# Altium PCB Power_driver_PCB.PcbDoc
Units mm, origin at the board's own origin, x right, y up, seen from the top; angles counter-clockwise.
Board outline 60 x 73.62 mm, 4 copper layers (Top Layer, GND layer, Power Layer, Bottom Layer), stack 1.572 mm thick; 105 components, 72 nets, 373 pads, 286 vias.
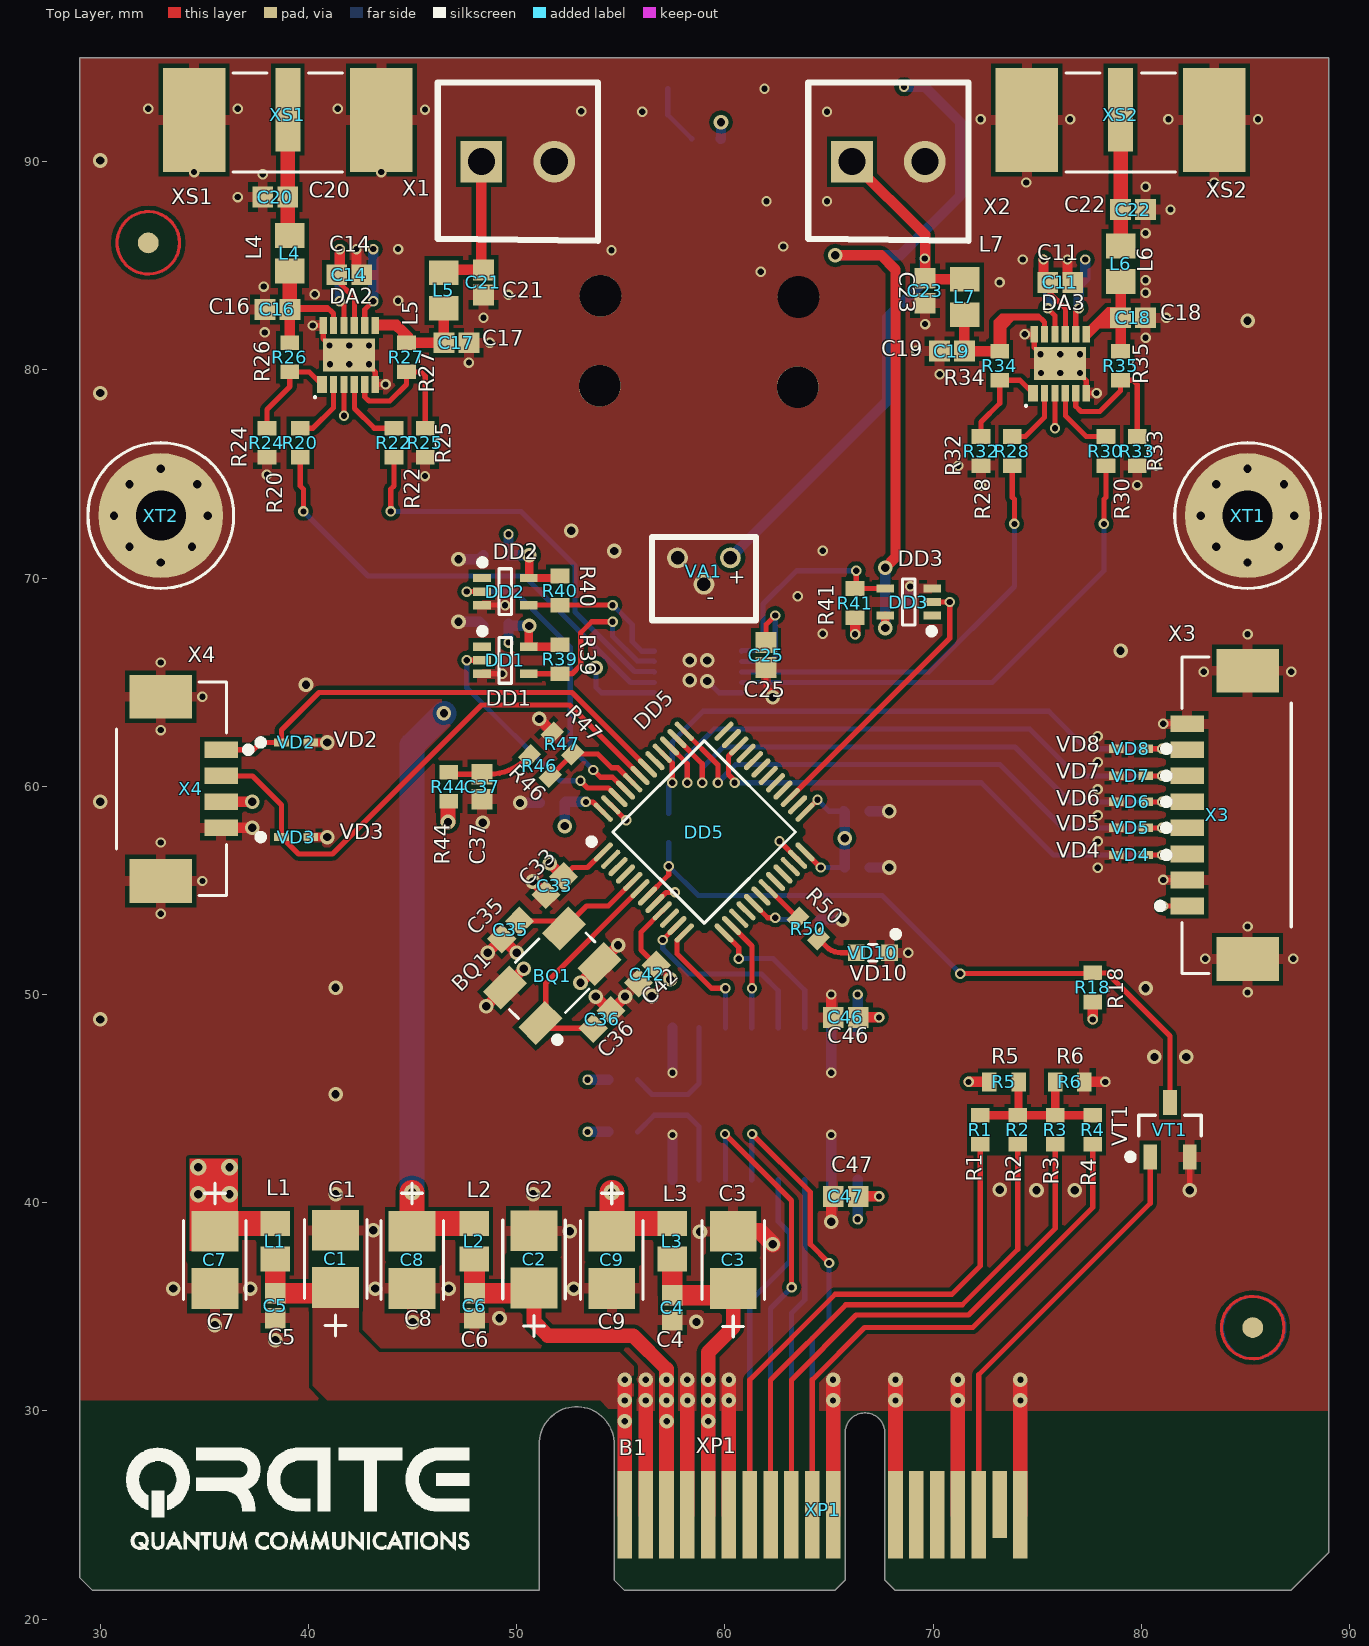
[diagram p0: Top Layer view]
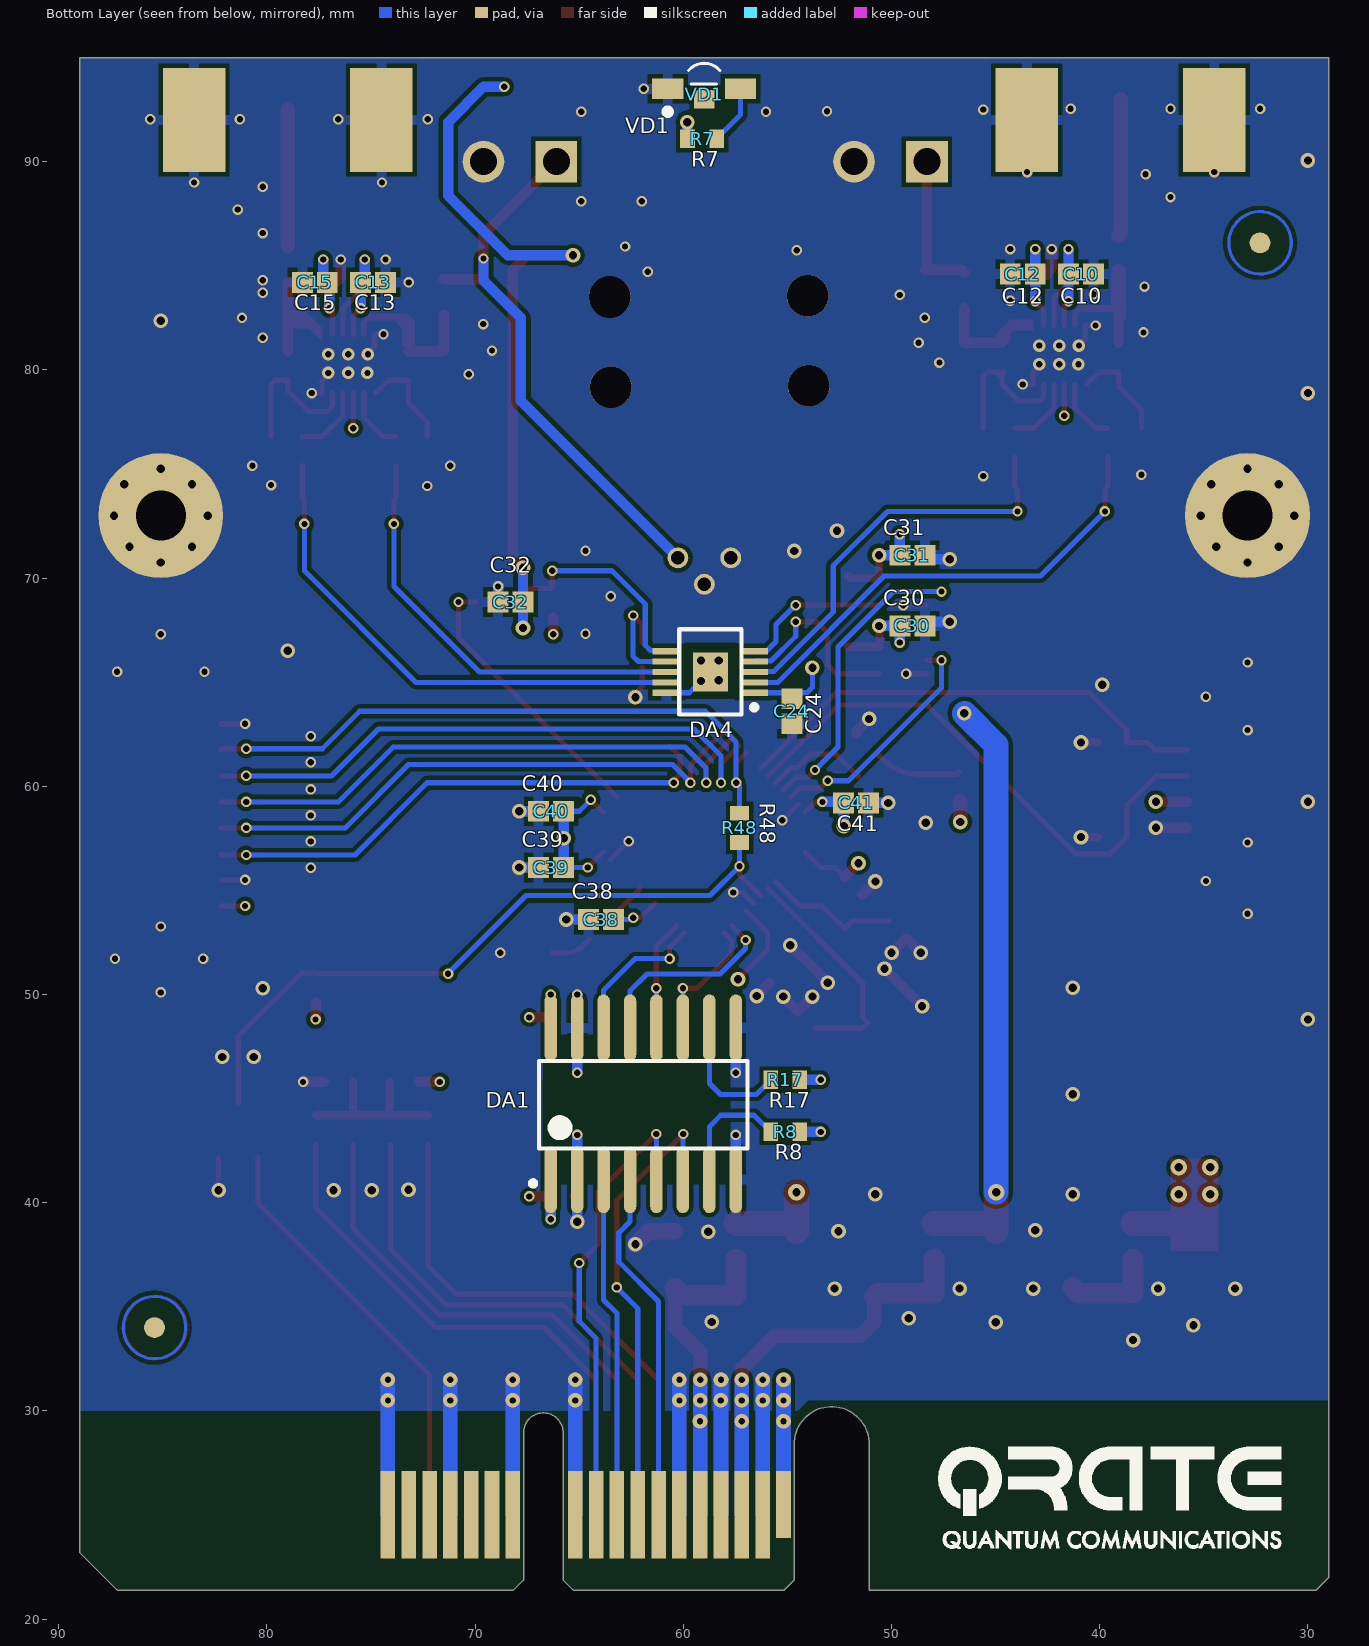
[diagram p1: Bottom Layer view, seen from below]
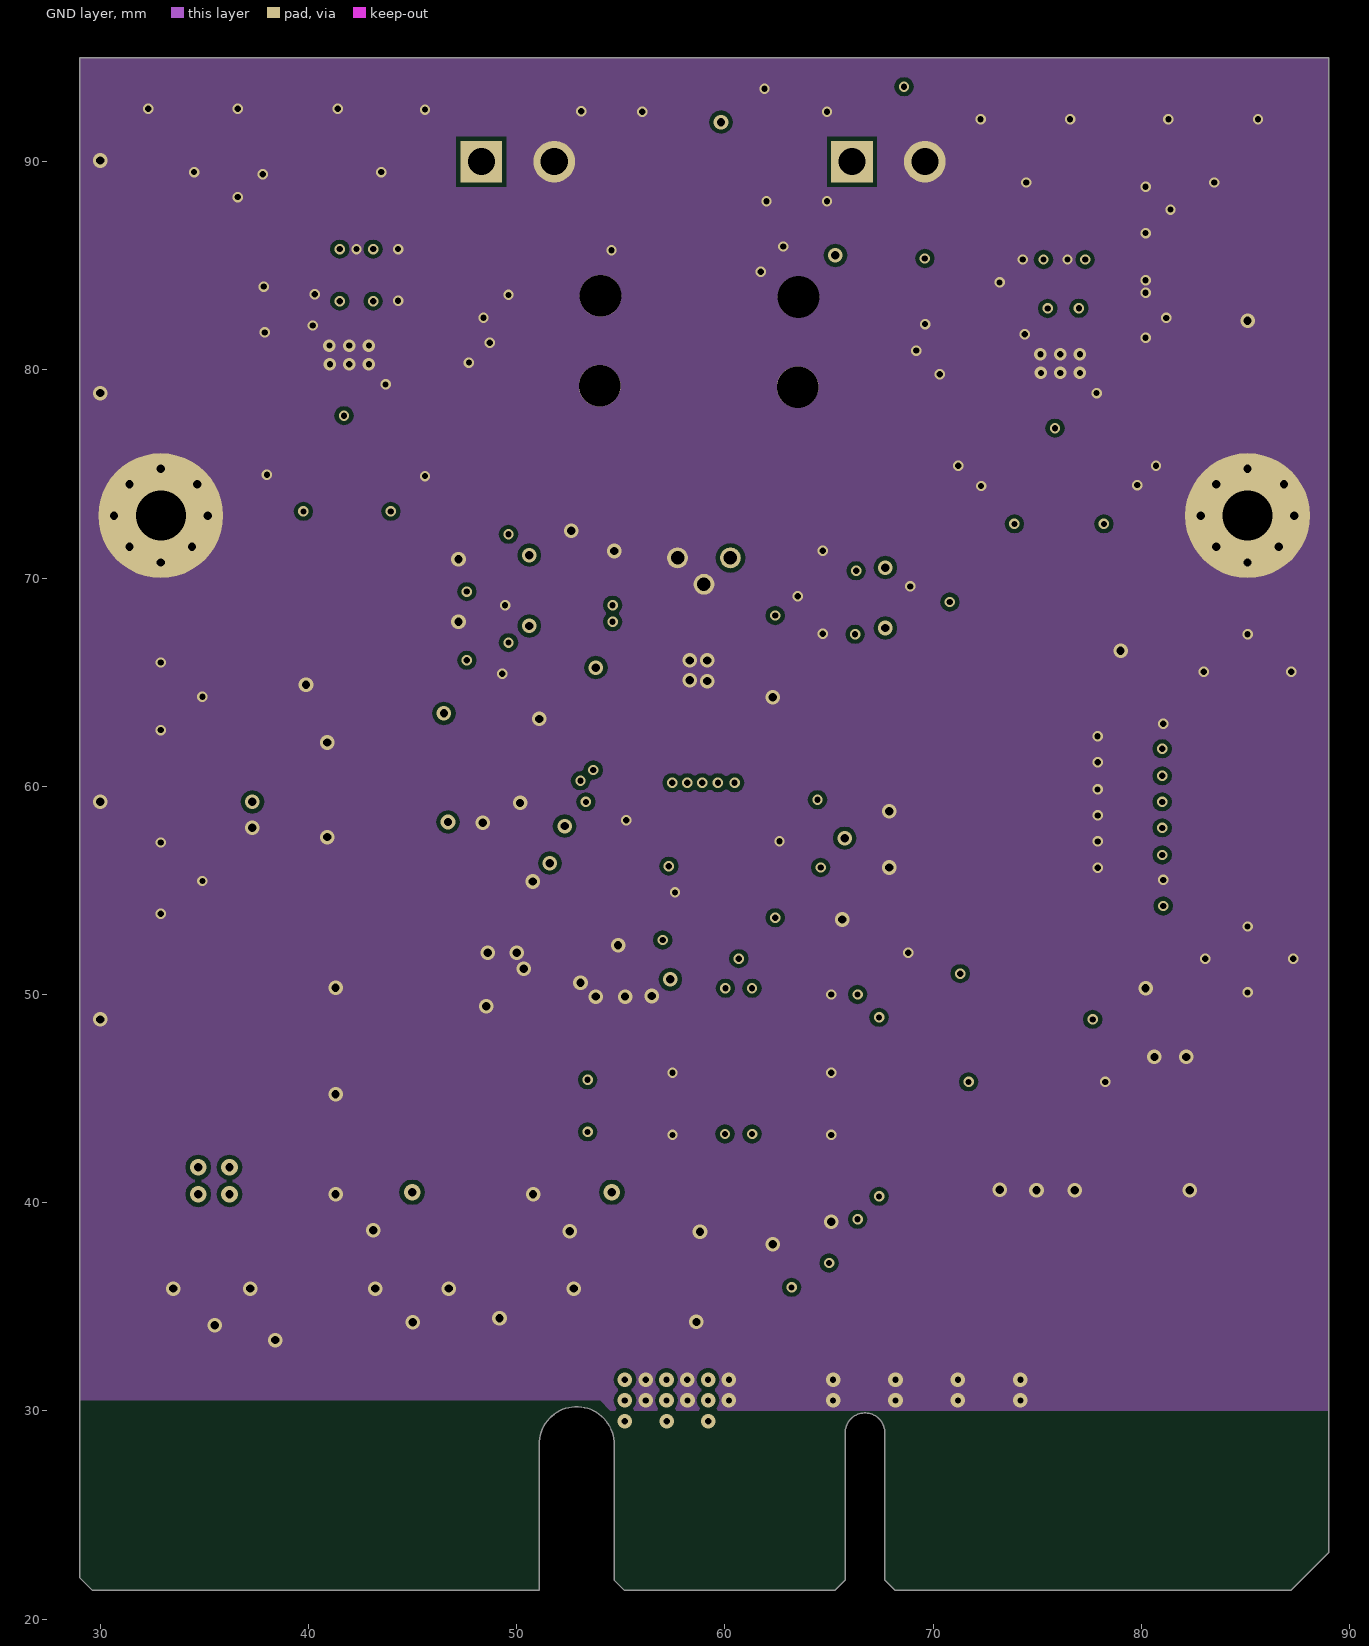
[diagram p2: GND layer]
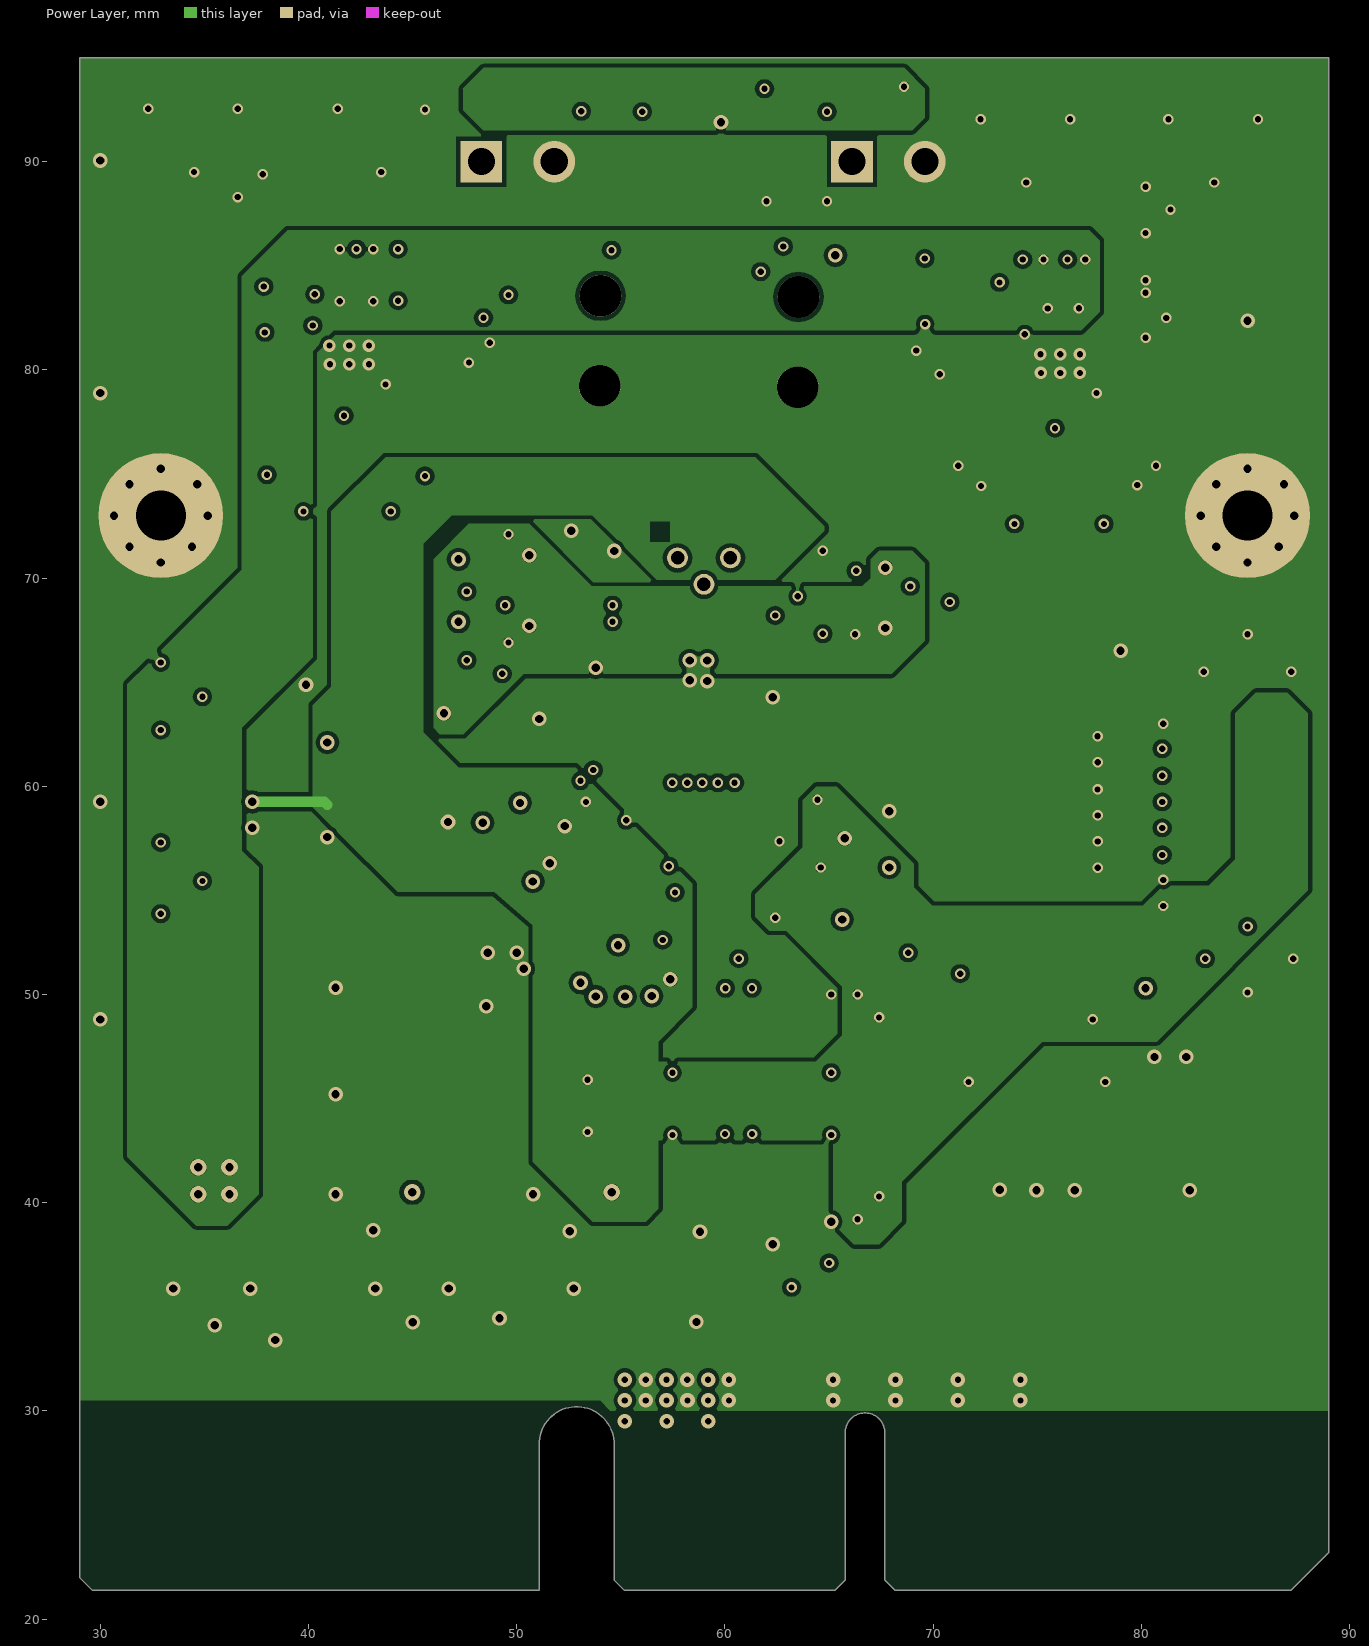
[diagram p3: Power Layer]
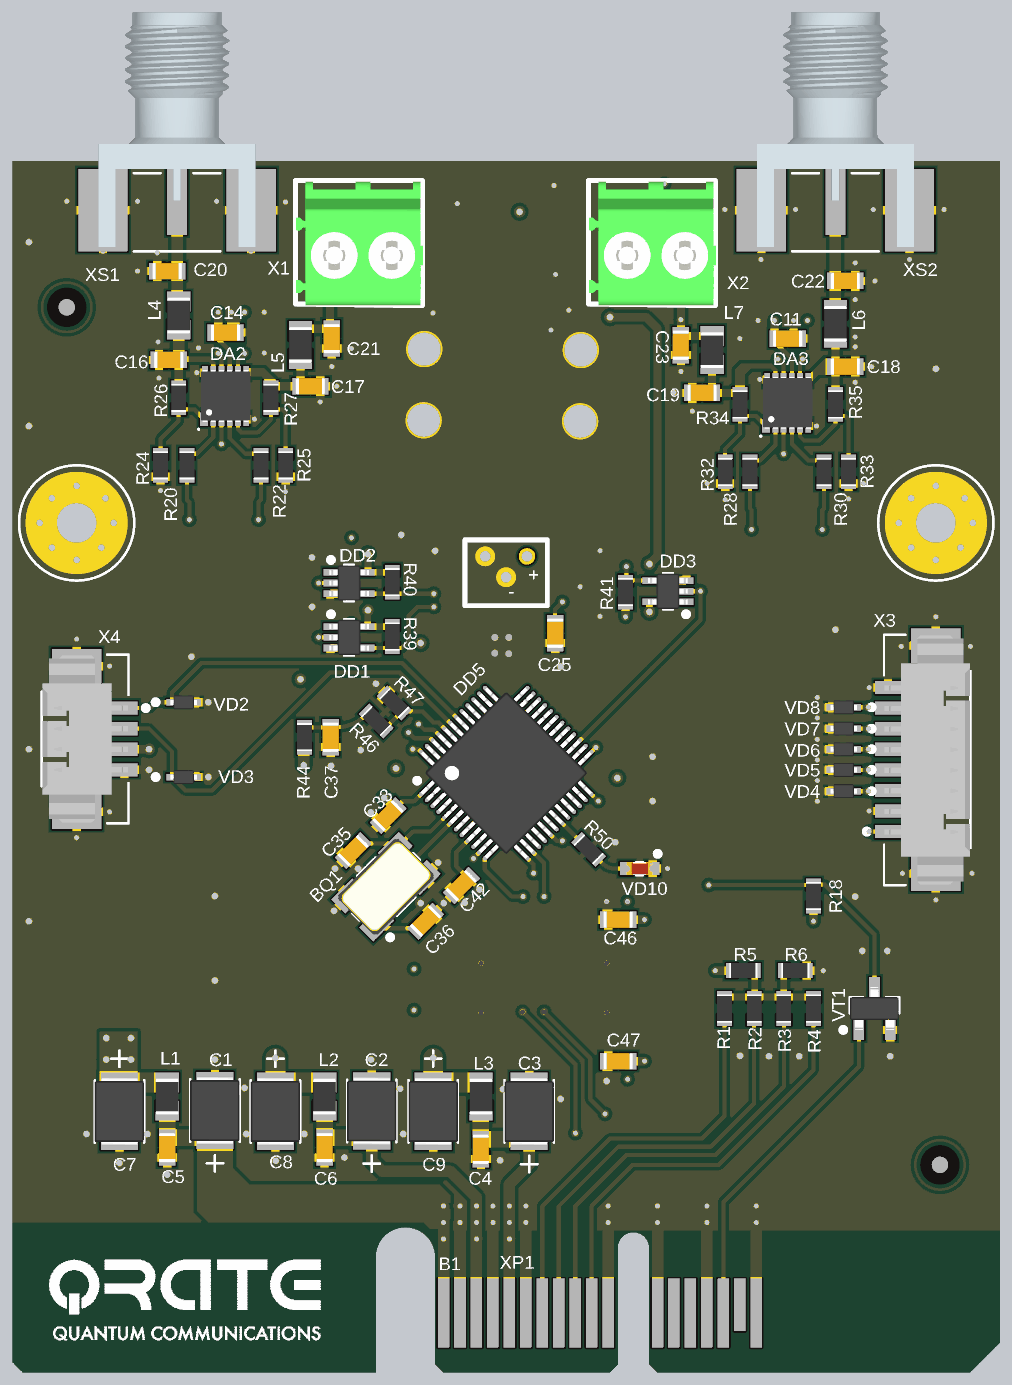
[diagram p4: 3D render of the assembled board from above, using the file's embedded part models]
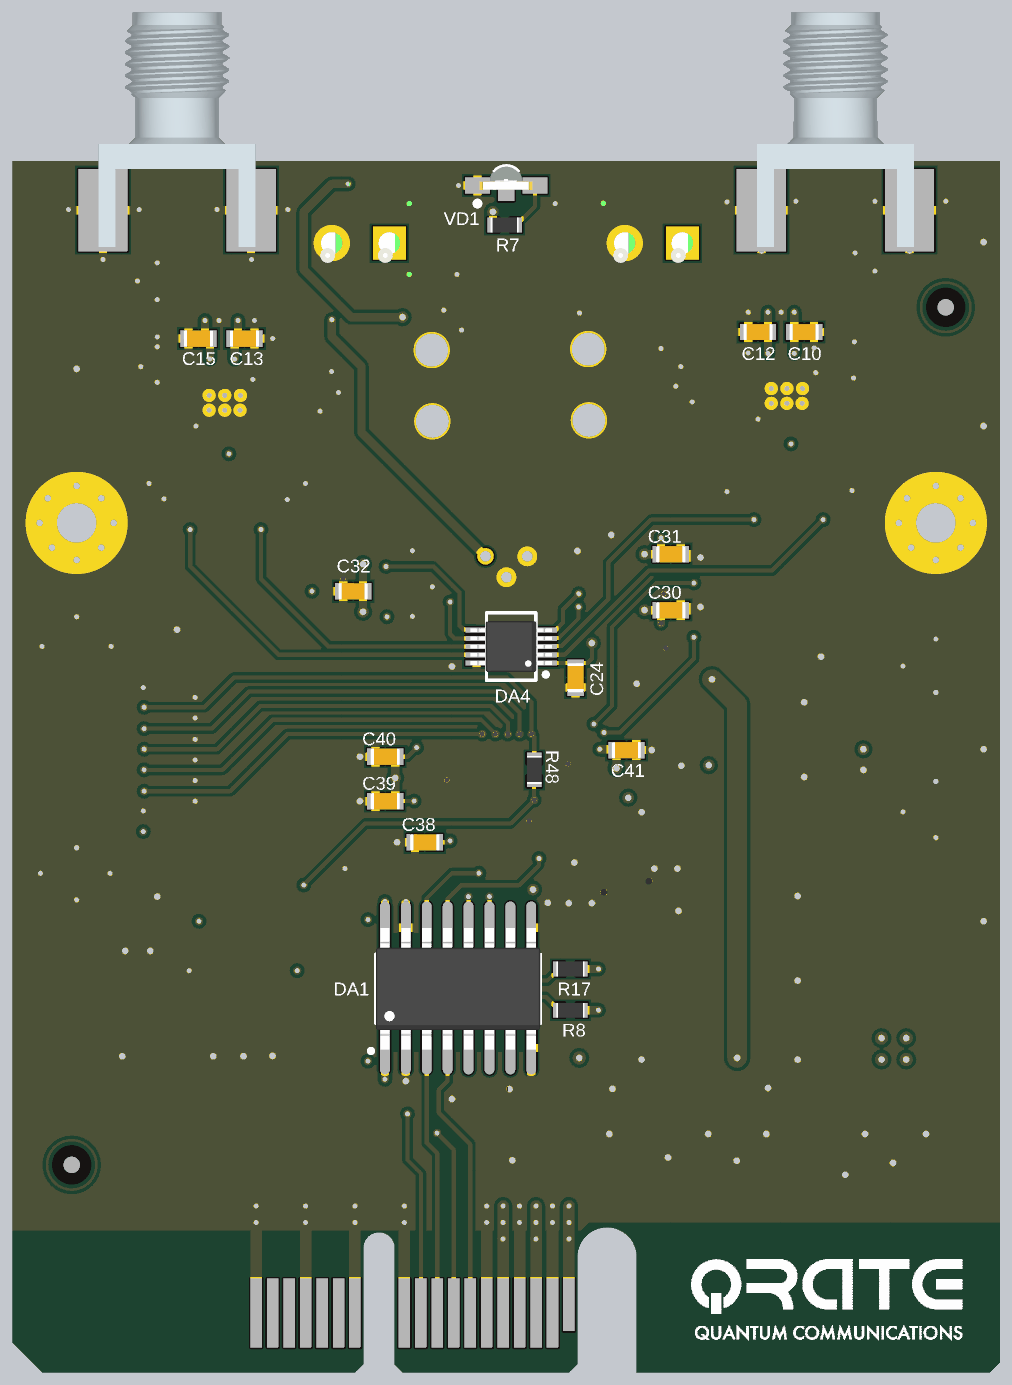
[diagram p5: 3D render of the assembled board from below, using the file's embedded part models]

## Layer stack, top to bottom
Top Solder: solder mask 0.02, Solder Resist, Dk 3.5
Top Layer: signal copper 0.018
Dielectric 1: prepreg 0.15, Dk 4.2
GND layer: signal copper 0.018
Dielectric 4: core 1.2, FR-4, Dk 4.2
Power Layer: signal copper 0.018
Dielectric 5: prepreg 0.15, Dk 4.2
Bottom Layer: signal copper 0.018
Bottom Solder: solder mask 0.02, Solder Resist, Dk 3.5

## Board outline
29,22 29.625,21.375 51.075,21.375 51.075,28.375 cw(c52.875,28.4) 54.675,28.375 54.675,21.875 55.175,21.375 65.275,21.375 65.775,21.875 65.775,28.925 cw(c66.725,28.953) 67.675,28.925 67.675,21.875 68.175,21.375 87.175,21.375 89,23.2 89,95 29,95

## Design rules (kind name [scope] priority, off if disabled: settings)
Clearance [All] p1: gap=0.2 ignorepadtopadclearanceinfootprint=FALSE except(0: Arc-Hole Track-Hole SMDPad-Hole THPad-Hole Via-Hole Fill-Hole Poly-Hole Region-Hole Text-Hole; 0.1: SMDPad-SMDPad Via-Via)
PlaneClearance [All] p1: clearance=0.2
PlaneConnect [All] p1: planeconnectstyle=Direct reliefexpansion=0.508 reliefentries=4 reliefconductorwidth=0.254 reliefairgap=0.254
PolygonConnect PolygonConnect_1 [InNet('GND')] p1: thpad.connectstyle=Direct thpad.reliefconductorwidth=0.254 thpad.reliefentries=4 thpad.polygonreliefangle="90 Angle" thpad.airgapwidth=0.254 smdpad.connectstyle=Relief smdpad.reliefconductorwidth=0.5 smdpad.reliefentries=4 smdpad.polygonreliefangle="90 Angle" smdpad.airgapwidth=0.2 via.connectstyle=Direct via.reliefconductorwidth=0.254 via.reliefentries=4 via.polygonreliefangle="90 Angle" via.airgapwidth=0.2
PolygonConnect [(InNet('+3,3V') AND InNet('+3,3V_IN') AND InNet('+12V_IN') AND InNet('+12V')AND InNet('+5V_IN') AND InNet('+5V'))] p2: connectstyle=Direct reliefconductorwidth=0.254 reliefentries=4 polygonreliefangle="90 Angle" airgapwidth=0.254
RoutingVias [All] p1: holewidth=0.4 width=0.7 viastyle="Through Hole" minholewidth=0.3 minwidth=0.5 maxholewidth=5 maxwidth=10
SolderMaskExpansion [All] p1: expansion=0.102
Width [All] p1: maxlimit=2 minlimit=0.1 preferedwidth=0.25
28 further rules are at their usual default settings.

## Classes and differential pairs
component class Power_driver_MCU: BQ1 C33 C35 C36 C37 C38 C39 C40 C41 C42 DD5 R44 R46 R47 R48 R50 VD10 VT1
component class Power_driver_power: C1 C2 C3 C4 C5 C6 C7 C8 C9 C46 C47 DA1 L1 L2 L3 R1 R2 R3 R4 R5 R6 R7 R8 R17 R18 VD1 VD2 VD3 VD4 VD5 VD6 VD7 VD8 XP1 XT1 XT2
component class Power_driver_DAC_Connectors: C24 C25 C30 C31 C32 DA4 DD1 DD2 DD3 R39 R40 R41 VA1 X1 X2 X3 X4 XS1 XS2
component class Power_driver_AMP: C10 C11 C12 C13 C14 C15 C16 C17 C18 C19 C20 C21 C22 C23 DA2 DA3 L4 L5 L6 L7 R20 R22 R24 R25 R26 R27 R28 R30 R32 R33 R34 R35

## Components (designator, comment, footprint, x,y, rotation, side; value= is the part's Value field where it differs from the comment)
BQ1 "8MHz 16pF" Crystal_50x32x110 51.7,50.9 r45 top
C1 "22u 20V" B_CAPMP3528X21N 41.3,37.3 r90 top
C2 "22u 20V" B_CAPMP3528X21N 50.828,37.275 r90 top
C3 "22u 20V" B_CAPMP3528X21N 60.394,37.25 r90 top
C4 "1u 50V" C0603_CAPC1608X09N 57.464,34.95 r90 top
C5 "1u 50V" C0603_CAPC1608X09N 38.4,35.05 r90 top
C6 "1u 50V" C0603_CAPC1608X09N 47.964,35.05 r90 top
C7 "22u 20V" B_CAPMP3528X21N 35.5,37.25 r270 top
C8 "22u 20V" B_CAPMP3528X21N 44.974,37.25 r270 top
C9 "22u 20V" B_CAPMP3528X21N 54.564,37.25 r270 top
C10 "0,1u 50V" C0603_CAPC1608X09N 40.9,84.6 r180 bottom
C11 "0,1u 50V" C0603_CAPC1608X09N 76.1,84.2 r0 top
C12 "0,1u 50V" C0603_CAPC1608X09N 43.7,84.6 r0 bottom
C13 "0,1u 50V" C0603_CAPC1608X09N 74.9,84.2 r180 bottom
C14 "0,1u 50V" C0603_CAPC1608X09N 41.95,84.565 r0 top
C15 "0,1u 50V" C0603_CAPC1608X09N 77.7,84.2 r0 bottom
C16 "1u 50V" C0603_CAPC1608X09N 38.5,82.9 r0 top
C17 "1u 50V" C0603_CAPC1608X09N 47.1,81.3 r180 top
C18 "1u 50V" C0603_CAPC1608X09N 79.6,82.5 r180 top
C19 "1u 50V" C0603_CAPC1608X09N 70.9,80.9 r0 top
C20 "0,1u 50V" C0603_CAPC1608X09N 38.4,88.3 r180 top
C21 "0,1u 50V" C0603_CAPC1608X09N 48.4,84.2 r270 top
C22 "0,1u 50V" C0603_CAPC1608X09N 79.6,87.7 r0 top
C23 "0,1u 50V" C0603_CAPC1608X09N 69.61,83.8 r270 top
C24 "0,1u 50V" C0603_CAPC1608X09N 54.786,63.6 r90 bottom
C25 "0,1u 50V" C0603_CAPC1608X09N 61.972,66.3 r90 top
C30 "0,1u 50V" C0603_CAPC1608X09N 49,67.7 r180 bottom
C31 "0,1u 50V" C0603_CAPC1608X09N 49,71.1 r180 bottom
C32 "0,1u 50V" C0603_CAPC1608X09N 68.3,68.85 r0 bottom
C33 "1u 50V" C0603_CAPC1608X09N 51.824,55.224 r45 top
C35 "5 50V" C0603_CAPC1608X09N 49.7,53.1 r45 top
C36 "5 50V" C0603_CAPC1608X09N 54.1,48.8 r225 top
C37 "0,1u 50V" C0603_CAPC1608X09N 48.334,59.98 r270 top
C38 "0,01u 50V" C0603_CAPC1608X09N 63.949,53.6 r180 bottom
C39 "0,01u 50V" C0603_CAPC1608X09N 66.35,56.097 r180 bottom
C40 "0,01u 50V" C0603_CAPC1608X09N 66.35,58.797 r180 bottom
C41 "0,1u 50V" C0603_CAPC1608X09N 51.7,59.2 r0 bottom
C42 "0,1u 50V" C0603_CAPC1608X09N 56.276,50.976 r45 top
C46 "0,01u 50V" C0603_CAPC1608X09N 65.8,48.899 r180 top
C47 "0,01u 50V" C0603_CAPC1608X09N 65.8,40.301 r180 top
DA1 "MAX14931DA" SOIC127P740X110-16N 61.925,44.7 r90 bottom
DA2 "NCS5652MUTWG" "UDFN12 3x3, 0.5P" 41.95,80.715 r90 top
DA3 "NCS5652MUTWG" "UDFN12 3x3, 0.5P" 76.1,80.3 r90 top
DA4 "LTC2634CMS-HZ8" MSOP50P500X110_HS-11N 58.7,65.489 r0 bottom
DD1 "SN74LVC1G07DCK" SC70_SOT65P210X110-5N 49.451,66.05 r0 top
DD2 "SN74LVC1G07DCK" SC70_SOT65P210X110-5N 49.451,69.35 r0 top
DD3 "SN74LVC1G07DCK" SC70_SOT65P210X110-5N 68.825,68.85 r180 top
DD5 "STM32F373CCT6" LQFP48_TSQFP50P900X900X160-48L 59,57.8 r45 top
L1 "220 2A" I0805_INDC2012X11N 38.4,38.15 r90 top
L2 "220 2A" I0805_INDC2012X11N 47.964,38.15 r90 top
L3 "220 2A" I0805_INDC2012X11N 57.464,38.15 r90 top
L4 "220 2A" I0805_INDC2012X11N 39.1,85.6 r90 top
L5 "220 2A" I0805_INDC2012X11N 46.5,83.815 r90 top
L6 "220 2A" I0805_INDC2012X11N 79,85.1 r90 top
L7 "220 2A" I0805_INDC2012X11N 71.51,83.5 r90 top
R1 "0 5%" R0603_RESC1608X06N 72.263,43.5 r90 top
R2 "0 5%" R0603_RESC1608X06N 74.063,43.5 r90 top
R3 "0 5%" R0603_RESC1608X06N 75.863,43.5 r90 top
R4 "0 5%" R0603_RESC1608X06N 77.663,43.5 r90 top
R5 "10k 5%" R0603_RESC1608X06N 73.4,45.8 r180 top
R6 "10k 5%" R0603_RESC1608X06N 76.563,45.8 r0 top
R7 "470 5%" R0603_RESC1608X06N 59.1,91.1 r180 bottom
R8 "3,32k 1%" R0603_RESC1608X06N 55.1,43.4 r0 bottom
R17 "3,32k 1%" R0603_RESC1608X06N 55.1,45.9 r0 bottom
R18 "3,32k 1%" R0603_RESC1608X06N 77.663,50.337 r90 top
R20 "0 5%" R0603_RESC1608X06N 39.6,76.5 r90 top
R22 "0 5%" R0603_RESC1608X06N 44.1,76.5 r90 top
R24 "10k 1%" R0603_RESC1608X06N 38,76.5 r90 top
R25 "10k 1%" R0603_RESC1608X06N 45.6,76.5 r90 top
R26 "30,1k 1%" R0603_RESC1608X06N 39.1,80.6 r90 top
R27 "30,1k 1%" R0603_RESC1608X06N 44.7,80.6 r90 top
R28 "49,9 1%" R0603_RESC1608X06N 73.8,76.1 r90 top
R30 "49,9 1%" R0603_RESC1608X06N 78.3,76.1 r90 top
R32 "10k 1%" R0603_RESC1608X06N 72.3,76.1 r90 top
R33 "10k 1%" R0603_RESC1608X06N 79.8,76.1 r90 top
R34 "10k 1%" R0603_RESC1608X06N 73.2,80.2 r90 top
R35 "10k 1%" R0603_RESC1608X06N 79,80.2 r90 top
R39 "10k 5%" R0603_RESC1608X06N 52.076,66.1 r270 top
R40 "10k 5%" R0603_RESC1608X06N 52.076,69.4 r270 top
R41 "10k 5%" R0603_RESC1608X06N 66.249,68.8 r90 top
R44 "100 5%" R0603_RESC1608X06N 46.734,59.98 r90 top
R46 "100 5%" R0603_RESC1608X06N 51.105,60.975 r315 top
R47 "10k 5%" R0603_RESC1608X06N 52.194,62.049 r315 top
R48 "100 5%" R0603_RESC1608X06N 57.3,58 r270 bottom
R50 "330 5%" R0603_RESC1608X06N 64,53.163 r315 top
VA1 "MEMS Attenuator" ATTENUATOR 58.991,70.97 r0 top
VD1 "Green" LED3010X012 60.75,93.5 r180 bottom locked
VD2 "PESD3V3S1UB,115" SOD523_SODFL160X65-2N 39.4,62.103 r0 top
VD3 "PESD3V3S1UB,115" SOD523_SODFL160X65-2N 39.4,57.561 r0 top
VD4 "PESD3V3S1UB,115" SOD523_SODFL160X65-2N 79.5,56.7 r180 top
VD5 "PESD3V3S1UB,115" SOD523_SODFL160X65-2N 79.5,58 r180 top
VD6 "PESD3V3S1UB,115" SOD523_SODFL160X65-2N 79.5,59.25 r180 top
VD7 "PESD3V3S1UB,115" SOD523_SODFL160X65-2N 79.5,60.5 r180 top
VD8 "PESD3V3S1UB,115" SOD523_SODFL160X65-2N 79.5,61.8 r180 top
VD10 "Red" LED_0603 67.9,52 r180 top
VT1 "BSS138" SOT23_SOT95P237X110-3M 81.374,43.5 r90 top
X1 "PT 1,5/ 2-3,5-H" "PT 1,5/ 2-3,5-H" 48.3,90 r0 top locked
X2 "PT 1,5/ 2-3,5-H" "PT 1,5/ 2-3,5-H" 66.1,90 r0 top locked
X3 "53261-0871" 53261-0871 82.2,54.25 r90 top
X4 "53261-0471" 53261-0471 35.8,61.75 r270 top
XP1 "" PCI_EXP_36_EDGE_mod 55.19,25 r0 top locked
XS1 "SMAf_edge_mount" 142-0701-851 39,92.5 r270 top locked
XS2 "SMAf_edge_mount" 142-0701-851 79,92.5 r270 top locked
XT1 "Single pin seat place under screw M2" S_MOUNT_M2 85.1,73 r0 top locked
XT2 "Single pin seat place under screw M2" S_MOUNT_M2 32.9,73 r0 top locked

## Footprints (in the part's own frame and the unit in brackets; to place one, negate y for a bottom-side part, rotate by r counter-clockwise, add the part's x,y. Pads: shape width x height; smd on the part's side, far side on the other; paste and mask are expansions set on the pad)
142-0701-851 [mm] "RF COAXIAL CONNECTOR 50 Ohms, 18GHz, SMA FEMALE,  PCB 1,5mm edge mounted, SMT"
  rect 4x1.2 smd: 1(0,0)
  rect 5x3 smd: 2(0.5,4.5) 4(0.5,-4.5)
  rect 5x3 smd far side: 3(0.5,4.5) 5(0.5,-4.5)
  silkscreen extent -1.75,-2.63 3,2.63, body extent -11.52,-4.76 2.75,4.76, height 4.09
53261-0471 [mm] "PicoBlade Header, 1,25mm Pitch, 1 Row, 4 Circuits, Right Angle, SMT"
  rect 0.8x1.6 smd: 1(0,0) 2(1.25,0) 3(2.5,0) 4(3.75,0)
  rect 2.1x3 smd: 5(-2.55,-2.9) 6(6.3,-2.9)
  silkscreen extent -3.25,-5.02 7,1.45, body extent -3.2,-4.98 6.95,0.22, height 3.38
53261-0871 [mm] "PicoBlade Header, 1,25mm Pitch, 1 Row, 8 Circuits, Right Angle, SMT"
  rect 0.8x1.6 smd: 1(0,0) 2(1.25,0) 3(2.5,0) 4(3.75,0) 5(5,0) 6(6.25,0) 7(7.5,0) 8(8.75,0)
  rect 2.1x3 smd: 9(-2.55,-2.9) 10(11.3,-2.9)
  silkscreen extent -3.25,-5 11.95,1.45, body extent -3.23,-4.97 11.92,0.23, height 3.38
ATTENUATOR [mm]
  round 1 hole 0.65: 1(-1.27,0) 2(0,-1.27) 3(1.27,0)
  silkscreen extent -2.5,-3 2.5,1, body extent -2.6,-1.77 2.6,20.5, height 8.1
B_CAPMP3528X21N [mm] "Molded Capacitor, Case B, 2-Leads, Body 3,50x2,80mm, IPC Medium Density"
  rect 1.95x2.25 smd: 1(-1.375,0) 2(1.375,0)
  silkscreen extent -3.7,-1.5 1.9,1.5, body extent -2.07,-1.5 2.07,1.5, height 2.1
C0603_CAPC1608X09N [mm] "0603, Chip Capacitor, 2-Leads, Body 1,60x0,80mm, IPC Medium Density"
  rect 1x1 smd: 1(-0.6,0) 2(0.6,0)
  body extent -0.9,-0.5 0.9,0.5, height 0.95
Crystal_50x32x110 [mm] "SMD Crystal 5.0x3.2x1.1 mm"
  rect 1.8x1.2 smd: 1(-2,-1.2) 2(2,-1.2) 3(2,1.2) 4(-2,1.2)
  silkscreen extent -2.6,-2.5 2.6,1.7, body extent -2.6,-1.7 2.6,1.7, height 1.01
I0805_INDC2012X11N [mm] "0805, Chip Inductor, 2-Leads, Body 2,00x1,20mm, IPC Medium Density"
  rect 1.19x1.42 smd: 1(-0.855,0) 2(0.855,0)
  body extent -1.1,-0.7 1.1,0.7, height 1.1
LED3010X012 [mm] "Chip LED, 2-Leads, Body 3,0x1,0mm"
  rect 1.5x1 smd: 1(0,0) 2(3.5,0)
  rect 1x0.9 smd: 3(1.75,-0.5)
  silkscreen extent -0.15,-1.25 2.51,1.22, body extent 0.13,-0.26 3.33,1.22, height 1.01
LED_0603 [mm] "0603 ChipLED"
  rect 0.8x0.8 smd: 1(0,0) 2(1.6,0)
  silkscreen extent -0.45,-1.05 1,0.4, body extent 0,-0.4 1.6,0.4, height 0.6
LQFP48_TSQFP50P900X900X160-48L [mm] "LQFP48, Body 7,00x7,00mm, Pitch 0,50mm, IPC High Density"
  oval 1.2x0.25 smd: 1(-4.1,2.75) 2(-4.1,2.25) 3(-4.1,1.75) 4(-4.1,1.25) 5(-4.1,0.75) 6(-4.1,0.25) 7(-4.1,-0.25) 8(-4.1,-0.75) 9(-4.1,-1.25) 10(-4.1,-1.75) 11(-4.1,-2.25) 12(-4.1,-2.75) 25(4.1,-2.75) 26(4.1,-2.25) 27(4.1,-1.75) 28(4.1,-1.25) 29(4.1,-0.75) 30(4.1,-0.25) 31(4.1,0.25) 32(4.1,0.75) 33(4.1,1.25) 34(4.1,1.75) 35(4.1,2.25) 36(4.1,2.75)
  oval 0.25x1.2 smd: 13(-2.75,-4.1) 14(-2.25,-4.1) 15(-1.75,-4.1) 16(-1.25,-4.1) 17(-0.75,-4.1) 18(-0.25,-4.1) 19(0.25,-4.1) 20(0.75,-4.1) 21(1.25,-4.1) 22(1.75,-4.1) 23(2.25,-4.1) 24(2.75,-4.1) 37(2.75,4.1) 38(2.25,4.1) 39(1.75,4.1) 40(1.25,4.1) 41(0.75,4.1) 42(0.25,4.1) 43(-0.25,4.1) 44(-0.75,4.1) 45(-1.25,4.1) 46(-1.75,4.1) 47(-2.25,4.1) 48(-2.75,4.1)
  silkscreen extent -4.3,-3.1 3.1,3.65, body extent -4.5,-4.5 4.5,4.5, height 1.6
MSOP50P500X110_HS-11N [mm] "MSOP, 10-Leads, Body 3,05x3,05mm, Pitch 0,50mm, Thermal Pad 1,88x1,68mm, IPC Medium Density"
  rect 1.35x0.3 smd: 1(-2.1,1) 2(-2.1,0.5) 3(-2.1,0) 4(-2.1,-0.5) 5(-2.1,-1) 6(2.1,-1) 7(2.1,-0.5) 8(2.1,0) 9(2.1,0.5) 10(2.1,1)
  rect 1.68x1.88 smd: 11(0,0)
  silkscreen extent -2.22,-2.05 1.5,2.05, body extent -2.47,-1.55 2.47,1.55, height 1.1
PCI_EXP_36_EDGE_mod [mm] "PCI Express 36 circuits, PCB edge mounted socket, SMT"
  rect 0.7x3.2 smd far side: A1(0,0.5)
  rect 0.7x4.2 smd far side: A2(1,0) A3(2,0) A4(3,0) A5(4,0) A6(5,0) A7(6,0) A8(7,0) A9(8,0) A10(9,0) A11(10,0) A12(13,0) A13(14,0) A14(15,0) A15(16,0) A16(17,0) A17(18,0) A18(19,0)
  rect 0.7x4.2 smd: B1(0,0) B2(1,0) B3(2,0) B4(3,0) B5(4,0) B6(5,0) B7(6,0) B8(7,0) B9(8,0) B10(9,0) B11(10,0) B12(13,0) B13(14,0) B14(15,0) B15(16,0) B16(17,0) B18(19,0)
  rect 0.7x3.2 smd: B17(18,0.5)
"PT 1,5/ 2-3,5-H" [mm]
  rect 2x2 hole 1.3: 1(0,0)
  round 2 hole 1.3: 2(3.5,0)
  silkscreen extent -2.1,-3.8 5.6,3.8, body extent -2.07,-3.8 5.63,3.75, height 9.15
R0603_RESC1608X06N [mm] "0603, Chip Resistor, 2-Leads, Body 1,60x0,80mm, IPC Medium Density"
  rect 0.7x0.9 smd: 1(-0.7,0) 2(0.7,0)
  body extent -0.85,-0.45 0.85,0.45, height 0.55
S_MOUNT_M2 [mm] "Single pin seat place under screw M2"
  round 6 hole 2.4 unplated: 1(0,0)
  silkscreen extent -3.5,-3.5 3.5,3.5
SC70_SOT65P210X110-5N [mm] "SC70, 5-Leads, Body 2,00x2,10mm, Pitch 0,65mm, IPC Medium Density"
  rect 0.85x0.4 smd: 1(-1.125,0.65) 2(-1.125,0) 3(-1.125,-0.65) 4(1.125,-0.65) 5(1.125,0.65)
  silkscreen extent -1.25,-1.1 0.3,1.55, body extent -1.2,-1.08 1.2,1.08, height 1.1
SOD523_SODFL160X65-2N [mm] "SODFL, 2-Leads, Body 0,80x1,60mm, IPC Medium Density"
  rect 0.7x0.4 smd: 1(-0.7,0) 2(0.7,0)
  silkscreen extent -1.85,-0.15 -1.55,0.15, body extent -0.8,-0.43 0.8,0.43, height 0.65
SOIC127P740X110-16N [mm] "SOIC, 16-Leads, Body 8,50x4,50mm, Pitch 1,27mm, IPC Medium Density"
  oval 3.2x0.6 smd: 1(-3.6,4.445) 2(-3.6,3.175) 3(-3.6,1.905) 4(-3.6,0.635) 5(-3.6,-0.635) 6(-3.6,-1.905) 7(-3.6,-3.175) 8(-3.6,-4.445) 9(3.7,-4.445) 10(3.7,-3.175) 11(3.7,-1.905) 12(3.7,-0.635) 13(3.7,0.635) 14(3.7,1.905) 15(3.7,3.175) 16(3.7,4.445)
  silkscreen extent -3.9,-5 2.1,5.42, body extent -3.69,-5 3.69,5, height 1.1
SOT23_SOT95P237X110-3M [mm] "SOT23, 3-Leads, Body 2,90x2,37mm, Pitch 0,95mm, IPC Low Density"
  rect 1.2x0.65 smd: 1(-1.3,0.95) 2(-1.3,-0.95) 3(1.3,0)
  silkscreen extent -1.45,-1.5 0.7,2.05, body extent -1.32,-1.5 1.32,1.5, height 1.1
"UDFN12 3x3, 0.5P" [mm] "UDFN, 0.5P 12-Leads, Body 3,00x3,00mm, Pitch 0,50mm, Thermal Pad 2,50x1,58mm, IPC Medium Density"
  rect 0.8x0.48 smd: 1(-1.415,1.315)
  rect 0.8x0.35 smd: 2(-1.415,0.75) 3(-1.415,0.25) 4(-1.415,-0.25) 5(-1.415,-0.75) 6(-1.415,-1.25) 7(1.415,-1.25) 8(1.415,-0.75) 9(1.415,-0.25) 10(1.415,0.25) 11(1.415,0.75) 12(1.415,1.25)
  rect 1.58x2.5 smd: 13(0,0)
  silkscreen extent -2.08,1.59 -1.98,1.69, body extent -1.57,-1.5 1.57,1.5, height 0.55

## Part data
BQ1: library part "KX-9A 8.0 MHz", "Резонатор кварцевый 8 МГц, 50 ppm, 16 пФ, 5,0 x 3,2mm, SMT", Manufacturer=Geyer, Designer=Pashinskiy, EOL=NO, HelpURL=Z:\LIB\ALTIUM\INFO\Crystal\GEYER-KX-9A_Series.pdf, ModelSTEP=Z:\LIB\ALTIUM\MODEL\STEP\Crystal\Crystal_smd_52x34x1.step, Modify=24.11.2016, Mount=SMT, PartNumber="KX-9A 8.0 MHz", ValueBOM="KX-9A 8.0 MHz", ValueSCH="8MHz 16pF"
C1 C2 C3 C7 C8 C9: library part 293D226X9020B2TE3, "Solid Tantalum Capacitor, General purpose, Surface Mount", Manufacturer=Vishay, ValueBOM="22мкФ ±10% 20В 2,1Ом Tantal B", Designer=Dudarev, EOL=NO, HelpURL=Z:\LIB\ALTIUM\INFO\Capacitor\Vishay293d-2.pdf, ModelSTEP=Z:\LIB\ALTIUM\MODEL\STEP\Capacitor\B_CAPMP3528X21.Step, Modify=28.06.2016, Mount=SMT, PartNumber=293D226X9020B2TE3, ValueSCH="22u 20V"
C4 C5 C6 C16 C17 C18 C19 C33: library part CC0603KRX7R9BB105, "Конденсатор керамический (MLCC) общего назначения 0603", Manufacturer=YAGEO, ValueBOM="1мкФ ±10% 50В X7R 0603", Designer=Dudarev, EOL=NO, HelpURL=Z:\LIB\ALTIUM\INFO\Capacitor\UPY-GPHC_X7R_6.3V-to-50V_13.pdf, ModelSTEP=Z:\LIB\ALTIUM\MODEL\STEP\Capacitor\C0603_CAPC1608X09.Step, Modify=28.06.2016, Mount=SMT, PartNumber=CC0603KRX7R9BB105, ValueSCH="1u 50V"
C10 C11 C12 C13 C14 C15 C20 C21 C22 C23 C24 C25 C30 C31 C32 C37 C41 C42: library part CC0603KRX7R9BB104, "Конденсатор керамический (MLCC) общего назначения 0603", Manufacturer=YAGEO, ValueBOM="0,1мкФ ±10% 50В X7R 0603", Designer=Dudarev, EOL=NO, HelpURL=Z:\LIB\ALTIUM\INFO\Capacitor\UPY-GPHC_X7R_6.3V-to-50V_13.pdf, ModelSTEP=Z:\LIB\ALTIUM\MODEL\STEP\Capacitor\C0603_CAPC1608X09.Step, Modify=28.06.2016, Mount=SMT, PartNumber=CC0603KRX7R9BB104, ValueSCH="0,1u 50V"
C35 C36: library part CC0603CRNPO9BN5R0, "Конденсатор керамический (MLCC) общего назначения 0603", Manufacturer=YAGEO, ValueBOM="5пФ ±0,25пФ 50В NP0 0603", Designer=Pashinskiy, EOL=NO, HelpURL=Z:\LIB\ALTIUM\INFO\Capacitor\UPY-GP_NP0_16V-to-50V_14.pdf, ModelSTEP=Z:\LIB\ALTIUM\MODEL\STEP\Capacitor\C0603_CAPC1608X09.Step, Modify=19.08.2016, Mount=SMT, PartNumber=CC0603CRNPO9BN5R0, ValueSCH="5 50V"
C38 C39 C40 C46 C47: library part CC0603KRX7R9BB103, "Конденсатор керамический (MLCC) общего назначения 0603", Manufacturer=YAGEO, ValueBOM="0,01мкФ ±10% 50В X7R 0603", Designer=Dudarev, EOL=NO, HelpURL=Z:\LIB\ALTIUM\INFO\Capacitor\UPY-GPHC_X7R_6.3V-to-50V_13.pdf, ModelSTEP=Z:\LIB\ALTIUM\MODEL\STEP\Capacitor\C0603_CAPC1608X09.Step, Modify=28.06.2016, Mount=SMT, PartNumber=CC0603KRX7R9BB103, ValueSCH="0,01u 50V"
DA1: "4-Channel, 1kVRMS, 2.75kVRMS, /  and 3.75kVRMS Digital Isolators"
DA2 DA3: "High Speed, High Output Current, Dual Operational Amplifier, SMT"
DA4: "SPI  Vout quad DAC with internal reference. MSOP 10"
DD1 DD2 DD3: "Single buffer\driver with open-drain outputs for 1.65 - 5.5V VCC operation SC70", Manufacturer=TI, Designer=Dudarev, EOL=NO, HelpURL=Z:\LIB\ALTIUM\INFO\IC_Logic\sn74lvc1g07.pdf, ModelSTEP=Z:\LIB\ALTIUM\MODEL\STEP\IC_SO\SC70_SOT65P210X110-5.Step, Modify=28.06.2016, Mount=SMT, PartNumber=SN74LVC1G07DCK, ValueBOM=SN74LVC1G07DCK, ValueSCH=SN74LVC1G07DCK
DD5: "Microcontroller ARM Cortex-M4, 32b, MCU+FPU, 1,25DMIPS, 256 kB Flash, 32kB SRAM, USB, LQFP48"
L1 L2 L3 L4 L5 L6 L7: library part BLM21PG221SN1D, "Chip Ferrite Bead 220 Ohm, 2A, 0805", Manufacturer="Murata Electronics", Designer=Pashinskiy, EOL=NO, HelpURL=Z:\LIB\ALTIUM\INFO\Inductor\Chip%20Ferrite%20Bead%20BLM21P%200805.pdf, ModelSTEP=Z:\LIB\ALTIUM\MODEL\STEP\Inductor\I0805_INDC2012X11.Step, Modify=16.08.2016, Mount=SMT, PartNumber=BLM21PG221SN1D, ValueBOM=BLM21PG221SN1D, ValueSCH="220 2A"
R1 R2 R3 R4 R20 R22: library part RC0603JR-070RL, "Резистор толстопленочный общего назначения 0603", Manufacturer=YAGEO, ValueBOM="0Ом 5% 75В 300ppm 0603", Designer=Dudarev, EOL=NO, HelpURL="Z:\LIB\ALTIUM\INFO\Resistor\YAGEO\Lead free chip resistors RC_P.pdf", ModelSTEP=Z:\LIB\ALTIUM\MODEL\STEP\Resistor\R0603_RESC1005X04.step, Modify=28.06.2016, Mount=SMT, PartNumber=RC0603JR-070RL, ValueSCH="0 5%"
  R1 R2 R3 R4: Staff=DNP
R5 R6 R39 R40 R41 R47: library part RC0603JR-0710KL, "Резистор толстопленочный общего назначения 0603", Manufacturer=YAGEO, ValueBOM="10кОм 5% 75В 150ppm 0603", Designer=Dudarev, EOL=NO, HelpURL="Z:\LIB\ALTIUM\INFO\Resistor\YAGEO\Lead free chip resistors RC_P.pdf", ModelSTEP=Z:\LIB\ALTIUM\MODEL\STEP\Resistor\R0603_RESC1005X04.step, Modify=28.06.2016, Mount=SMT, PartNumber=RC0603JR-0710KL, ValueSCH="10k 5%"
  R6: Staff=DNP
R7: library part RC0603JR-07470RL, "Резистор толстопленочный общего назначения 0603", Manufacturer=YAGEO, ValueBOM="470Ом 5% 75В 150ppm 0603", Designer=Dudarev, EOL=NO, HelpURL="Z:\LIB\ALTIUM\INFO\Resistor\YAGEO\Lead free chip resistors RC_P.pdf", ModelSTEP=Z:\LIB\ALTIUM\MODEL\STEP\Resistor\R0603_RESC1005X04.step, Modify=28.06.2016, Mount=SMT, PartNumber=RC0603JR-07470RL, ValueSCH="470 5%"
R8 R17 R18: library part RC0603FR-073K32L, "Резистор толстопленочный общего назначения 0603", Manufacturer=YAGEO, ValueBOM="3,32кОм 1% 75В 150ppm 0603", Designer=Dudarev, EOL=NO, HelpURL="Z:\LIB\ALTIUM\INFO\Resistor\YAGEO\Lead free chip resistors RC_P.pdf", ModelSTEP=Z:\LIB\ALTIUM\MODEL\STEP\Resistor\R0603_RESC1005X04.step, Modify=28.06.2016, Mount=SMT, PartNumber=RC0603FR-073K32L, ValueSCH="3,32k 1%"
R24 R25 R32 R33 R34 R35: library part RC0603FR-0710KL, "Резистор толстопленочный общего назначения 0603", Manufacturer=YAGEO, ValueBOM="10кОм 1% 75В 150ppm 0603", Designer=Dudarev, EOL=NO, HelpURL="Z:\LIB\ALTIUM\INFO\Resistor\YAGEO\Lead free chip resistors RC_P.pdf", ModelSTEP=Z:\LIB\ALTIUM\MODEL\STEP\Resistor\R0603_RESC1005X04.step, Modify=28.06.2016, Mount=SMT, PartNumber=RC0603FR-0710KL, ValueSCH="10k 1%"
R26 R27: library part RC0603FR-0730K1L, "Резистор толстопленочный общего назначения 0603", Manufacturer=YAGEO, ValueBOM="30,1кОм 1% 75В 150ppm 0603", Designer=Dudarev, EOL=NO, HelpURL="Z:\LIB\ALTIUM\INFO\Resistor\YAGEO\Lead free chip resistors RC_P.pdf", ModelSTEP=Z:\LIB\ALTIUM\MODEL\STEP\Resistor\R0603_RESC1005X04.step, Modify=28.06.2016, Mount=SMT, PartNumber=RC0603FR-0730K1L, ValueSCH="30,1k 1%"
R28 R30: library part RC0603FR-0749R9L, "Резистор толстопленочный общего назначения 0603", Manufacturer=YAGEO, ValueBOM="49,9Ом 1% 75В 200ppm 0603", Designer=Dudarev, EOL=NO, HelpURL="Z:\LIB\ALTIUM\INFO\Resistor\YAGEO\Lead free chip resistors RC_P.pdf", ModelSTEP=Z:\LIB\ALTIUM\MODEL\STEP\Resistor\R0603_RESC1005X04.step, Modify=28.06.2016, Mount=SMT, PartNumber=RC0603FR-0749R9L, ValueSCH="49,9 1%"
R44 R46 R48: library part RC0603JR-07100RL, "Резистор толстопленочный общего назначения 0603", Manufacturer=YAGEO, ValueBOM="100Ом 5% 75В 200ppm 0603", Designer=Dudarev, EOL=NO, HelpURL="Z:\LIB\ALTIUM\INFO\Resistor\YAGEO\Lead free chip resistors RC_P.pdf", ModelSTEP=Z:\LIB\ALTIUM\MODEL\STEP\Resistor\R0603_RESC1005X04.step, Modify=28.06.2016, Mount=SMT, PartNumber=RC0603JR-07100RL, ValueSCH="100 5%"
  R44: Staff=DNP
R50: library part RC0603JR-07330RL, "Резистор толстопленочный общего назначения 0603", Manufacturer=YAGEO, ValueBOM="330Ом 5% 75В 150ppm 0603", Designer=Dudarev, EOL=NO, HelpURL="Z:\LIB\ALTIUM\INFO\Resistor\YAGEO\Lead free chip resistors RC_P.pdf", ModelSTEP=Z:\LIB\ALTIUM\MODEL\STEP\Resistor\R0603_RESC1005X04.step, Modify=28.06.2016, Mount=SMT, PartNumber=RC0603JR-07330RL, ValueSCH="330 5%"
VD1: library part 155124VS73200, "LED SMD Right Angle Bright Green 3mm x 1mm (1204)", Manufacturer="Wurth Elektronik", Designer=Dudarev, EOL=NO, HelpURL=Z:\LIB\ALTIUM\INFO\LED\155124VS73200.pdf, ModelSTEP=Z:\LIB\ALTIUM\MODEL\STEP\LED\WL-SMSW_1204_round.step, Modify=08.06.2016, Mount=SMT, PartNumber=155124VS73200, ValueBOM=155124VS73200, ValueSCH=Green
VD2 VD3 VD4 VD5 VD6 VD7 VD8: "Transient Voltage Suppressor, 3.3V, Unidirectional,  SOD-523", Manufacturer=NXP, Designer=Pashinskiy, EOL=NO, HelpURL=Z:\LIB\ALTIUM\INFO\Suppressor\PESDXS1UB_SERIES.pdf, ModelSTEP=Z:\LIB\ALTIUM\MODEL\STEP\Suppressor\SOD523.Step, Modify=23.11.2016, Mount=SMT, PartNumber=PESD3V3S1UB,115, ValueBOM=PESD3V3S1UB,115, ValueSCH=PESD3V3S1UB,115
VD10: library part VLMS1300-GS08, "LED SMD Super Red 1,6mm x 0,8mm", Manufacturer="Vishay Semiconductors", Designer=Losev, EOL=NO, HelpURL=Z:\LIB\ALTIUM\INFO\LED\vlmo1300-241412.pdf, ModelSTEP="Z:\LIB\ALTIUM\MODEL\STEP\LED\User Library-LED_0603_R.STEP", Modify=11.11.2016, Mount=SMT, PartNumber=VLMS1300-GS08, ValueBOM=VLMS1300-GS08, ValueSCH=Red
VT1: library part N-MOSFET, "N-Channel MOSFET transistor Logic level"
X1 X2: "PT 1,5/ 2-3,5-H Terminal Block Connector. Strait"
X3: "PicoBlade Header, 1,25mm Pitch, 1 Row, 8 Circuits, Right Angle, SMT", Manufacturer=Molex, Designer=Martynov, EOL=NO, HelpURL=Z:\LIB\ALTIUM\INFO\Connector_PIN\53261-0xxx.pdf, ModelSTEP=Z:\LIB\ALTIUM\MODEL\STEP\Connector_PIN\532610871.step, Modify=10.04.2017, Mount=SMT, PartNumber=53261-0871, ValueBOM=53261-0871, ValueSCH=53261-0871
X4: "PicoBlade Header, 1,25mm Pitch, 1 Row, 4 Circuits, Right Angle, SMT", Manufacturer=Molex, Designer=Martynov, EOL=NO, HelpURL=Z:\LIB\ALTIUM\INFO\Connector_PIN\53261-0xxx.pdf, ModelSTEP=Z:\LIB\ALTIUM\MODEL\STEP\Connector_PIN\532610471.step, Modify=10.04.2017, Mount=SMT, PartNumber=53261-0471, ValueBOM=53261-0471, ValueSCH=53261-0471
XP1: library part PCI_EXP_36_EDGE_mod, "PCI Express connector 36 circuits"
XS1 XS2: library part 142-0701-851, "RF COAXIAL CONNECTOR 50 Ohms, 18GHz, SMA FEMALE,  PCB 1,5mm edge mounted, SMT", Manufacturer=Johnson, Designer=Pashinskiy, EOL=NO, HelpURL=Z:\LIB\ALTIUM\INFO\Connector_Misc\dr-1420701851.pdf, ModelSTEP=Z:\LIB\ALTIUM\MODEL\STEP\Connector_Misc\dr-3d-CSS-JOHN-142-0701-851.stp, Modify=09.02.2017, Mount=SMT, PartNumber=142-0701-851, ValueBOM=142-0701-851, ValueSCH=SMAf_edge_mount
XT1 XT2: library part S_MOUNT_M2, Manufacturer=RQC, ValueBOM="Отверстие под винт М2", Designer=Pashinskiy, EOL=NO, Modify=16.09.2016, Mount=-, PartNumber=S_MOUNT_M2, ValueSCH="Single pin seat place under screw M2"

## Free pads (board coordinates)
  round 1 smd mask+0.7: 2(32.3,86.1) 2(85.35,34)
  round 1 smd far side mask+0.7: 2(32.3,86.1) 2(85.4,34)
  round 2 hole 2 unplated: 3(53.981,79.233) 3(54.02,83.56) 4(63.49,79.173) 4(63.529,83.501)

## Via types
v1: diameter 0.5, hole 0.3, Top Layer to Bottom Layer, tented both sides, 154 vias
v2: diameter 0.7, hole 0.4, Top Layer to Bottom Layer, tented both sides, 75 vias
v3: diameter 0.7, hole 0.3, Top Layer to Bottom Layer, tented both sides, 23 vias
v4: diameter 0.9, hole 0.4, Top Layer to Bottom Layer, 16 vias
v5: diameter 0.6, hole 0.3, Top Layer to Bottom Layer, 12 vias
v6: diameter 0.8, hole 0.4, Top Layer to Bottom Layer, tented both sides, 6 vias

## Nets (pads, with @x,y where several pads share a name; then routed paths per layer and width w, separated by ;. In a path a pad name is that pad's centre, name@x,y a point inside that pad or via, vN(x,y) a via of type N, cw(c..) or ccw(c..) an arc to the next point about the centre after c; other vN are vias at no path point)
5V_CS2: DA4.4 DD1.4 R39.2 | length 9.2
  Top Layer w0.25: DD1.4 R39.2 52.657,65.4 53.076,65.818 53.076,67.373 53.602,67.9 v1(54.6,67.9)
  Bottom Layer w0.25: v1(54.6,67.9) 54.6,67.205 55.79,66.014 56.575,66.014 DA4.4
5V_DIN: DA4.6 DD3.4 R41.2 | length 10.5
  Top Layer w0.25: v1(66.3,70.35) 66.3,69.551 66.351,69.5 DD3.4
  Bottom Layer w0.25: DA4.6 60.825,66.514 61.574,66.514 61.832,66.772 61.832,68.752 63.43,70.35 v1(66.3,70.35)
5V_SCLK: DA4.5 DD2.4 R40.2 | length 7.4
  Top Layer w0.25: DD2.4 R40.2 v1(54.6,68.7)
  Bottom Layer w0.25: v1(54.6,68.7) 54.613,68.7 55.544,67.769 55.544,66.95 56.005,66.489 DA4.5
+3,3V_IN: C3.1 C4.2 L3.1 XP1.A5 XP1.B5 | length 22.7
  Top Layer w0.7: XP1.B5 v3(59.19,31.5) 59.19,32.815 60.394,34.019 C3.1
  Top Layer w1: L3.1 C4.2 60.069,35.55 C3.1
  Bottom Layer w0.7: XP1.A5 v3(59.19,30.5) v3(59.19,31.5)
  other v3: 59.2,29.5
+3V3: C9.1 C33.2 C38.2 C39.2 C40.2 C41.2 C42.2 C46.1 C47.1 DA1.1 DA1.16 DD5.1 DD5.9 DD5.17 DD5.24 DD5.25 DD5.48 L3.2 R5.2 R8.1 R17.1 R18.1 R44.1 X3.1 X4.3 | length 42.5
  Top Layer w0.25: C33.2 52.692,56.092 53.402,56.092 DD5.1 ; v1(53.32,59.25) 53.661,59.25 DD5.48 ; DD5.9 55.959,52.992 55.959,52.141 C42.2 v2(57.374,50.726) ; DD5.17 62.052,53.687 v1(62.411,53.687) ; DD5.24 63.849,56.845 v1(64.595,56.1) ; DD5.25 v1(64.445,59.356) ; v1(81.05,54.25) X3.1
  Top Layer w0.5: X4.3 v2(37.3,59.25) ; R44.1 R44.1@46.831,59.28 ; v2(51.589,56.308) C33.2 ; C46.1@66.37,48.929 C46.1 v1(67.4,48.899) ; C47.1 v1(67.4,40.301) ; v1(71.7,45.8) R5.2 ; v1(77.663,48.8) R18.1
  Top Layer w0.7: v2(46.696,58.284) 46.696,59.243 R44.1
  Top Layer w1.2: v6(54.564,40.5) C9.1 54.944,39.005 L3.2
  Power Layer w0.5: v2(37.3,59.25) 40.757,59.25 40.9,59.107
  Bottom Layer w0.25: v1(62.411,53.687) 62.498,53.6 C38.2 ; v1(64.445,59.356) 65.004,58.797 65.699,58.797 C40.2 ; v1(64.595,56.1) 65.746,56.1 C39.2
  Bottom Layer w0.5: v2(52.3,58.089) C41.2 52.35,59.25 v1(53.32,59.25) ; v1(53.4,43.4) R8.1 ; v1(53.4,45.9) R17.1 ; C40.2@65.699,58.797 65.75,58.746 v2(65.75,57.506) C39.2 ; v1(66.37,39.2) DA1.1 ; DA1.16@66.37,48.1 DA1.16 v1(66.37,50)
+5V: C8.1 C24.2 C30.1 C31.1 C32.1 DA4.1 DD1.5 DD2.5 DD3.5 L2.2 R7.1 R39.1 R40.1 R41.1 | length 78.7
  Top Layer w0.4: v2(50.6,67.7) 50.6,67.751 50.576,67.776 DD1.5 R39.1@52.076,66.7 ; v2(50.6,71.1) 50.6,70.024 DD2.5 51.976,70 R40.1 ; v2(67.7,67.6) DD3.5
  Top Layer w0.5: v2(65.3,85.5) 67.5,85.5 68.19,84.81 68.19,70.99 v2(67.7,70.5) ; v1(66.249,67.3) R41.1
  Top Layer w1.2: v6(44.974,40.5) C8.1 45.354,39.005 L2.2
  Bottom Layer w0.25: v2(53.8,65.7) 53.8,64.756 54.067,64.489 DA4.1
  Bottom Layer w0.5: v1(49.6,66.9) C30.1 49.6,67.8 49.7,67.7 v2(50.6,67.7) ; v1(49.6,72.1) C31.1 v2(50.6,71.1) ; R7.1 59.81,91.11 v2(59.81,91.9) ; v2(65.3,85.5) 68.427,85.5 71.3,88.373 71.3,91.9 69.6,93.6 v1(68.6,93.6) ; v2(67.7,67.6) C32.1 v2(67.7,70.5)
  Bottom Layer w1.2: v6(44.974,40.5) 44.974,61.974 v2(46.5,63.5)
+5V_IN: C2.1 C6.2 L2.1 XP1.A3 XP1.B3 | length 26.6
  Top Layer w0.7: C2.1@50.828,35.5 50.828,34.272 51.5,33.6 55.6,33.6 57.19,32.01 v3(57.19,31.5) ; XP1.B3 v3(57.19,31.5)
  Top Layer w1: L2.1 C6.2 50.678,35.65 C2.1@50.828,35.5
  Bottom Layer w0.7: XP1.A3 v3(57.19,30.5) v3(57.19,31.5)
  other v3: 57.2,29.5
+12V: C7.1 C10.1 C11.1 C12.1 C13.1 C14.1 C15.1 DA2.8 DA2.9 DA2.10 DA3.8 DA3.9 DA3.10 L1.2 | length 26.3
  Top Layer w0.25: C14.1 41.35,84.305 42.2,83.455 DA2.9 ; v1(41.5,83.3) 41.7,83.1 DA2.10 ; DA2.8 42.7,82.9 v1(43.1,83.3) ; v1(75.5,82.95) 75.85,82.6 DA3.10 ; C11.1 75.5,83.8 76.35,82.95 DA3.9 ; DA3.8 76.85,82.81 v1(77,82.96)
  Top Layer w0.5: C14.1 41.5,84.715 v1(41.5,85.8) ; v1(75.3,85.3) 75.3,84.4 C11.1
  Top Layer w1.2: C7.1 35.88,39.005 L1.2
  Bottom Layer w0.5: v1(41.5,83.3) C10.1 v1(41.5,85.8) ; v1(43.1,83.3) C12.1 v1(43.1,85.8) ; v1(75.3,85.3) 75.3,84.4 C13.1 v1(75.5,82.95) ; v1(77,82.96) 77,84.1 C15.1 77.3,84.4 v1(77.3,85.3)
  other v6: 34.7,40.4 36.2,40.4 34.7,41.7 36.2,41.7
+12V_IN: C1.1 C5.2 L1.1 XP1.A1 XP1.B1 | length 17.2
  Top Layer w0.7: XP1.B1 v3(55.19,31.5)
  Top Layer w1: L1.1 C5.2 41.025,35.65 C1.1
  Bottom Layer w0.7: XP1.A1 v3(55.19,31.5)
  other v3: 55.19,29.5 55.19,30.5
CLK: DA1.13 DD5.11 | length 9.5
  Top Layer w0.25: v1(57.009,52.616) 57.009,52.627 DD5.11
  Bottom Layer w0.25: v1(57.009,52.616) 57.009,52.214 58.235,50.988 61.747,50.988 62.56,50.175 DA1.13
CLK2: DD2.2 DD5.45 | length 15.1
  Top Layer w0.25: v1(47.601,69.35) DD2.2 ; v1(53.676,60.779) 54.02,60.435 54.597,60.435 DD5.45
  Bottom Layer w0.25: v1(47.601,69.35) 49.905,69.35 52.565,66.689 52.565,61.89 v1(53.676,60.779)
CLK_IN: DA1.4 XP1.A7 | length 17.1
  Bottom Layer w0.25: XP1.A7 61.19,35.254 63.1,37.164 63.1,38.55 62.56,39.09 DA1.4
CS: DA1.12 DD5.14 | length 5.3
  Top Layer w0.25: DD5.14 61.298,52.32 v1(61.298,50.3)
  Bottom Layer w0.25: DA1.12 v1@61.29,50.175 ; v1@61.29,50.3 v1@61.29,50.175 ; v1@61.298,50.183 v1@61.29,50.175
CS2: DD1.2 DD5.46 | length 11.5
  Top Layer w0.25: v1(47.601,66.05) DD1.2 ; v1(53.06,60.263) 53.402,59.921 54.404,59.921 DD5.46
  Bottom Layer w0.25: v1(47.601,66.05) 47.601,64.733 52.07,60.263 v1(53.06,60.263)
CS_IN: DA1.5 XP1.A10 | length 22.3
  Top Layer w0.25: v1(61.3,43.3) 64.1,40.5 64.1,38 v1(65,37.1)
  Bottom Layer w0.25: DA1.5 v1@61.29,43.256 ; XP1.A10 64.19,33.49 65,34.3 v1(65,37.1)
ERR3_5V: DA2.3 | length 1.5
  Top Layer w0.25: v1(41.7,77.8) DA2.3
ERR4_5V: DA3.3 | length 1.7
  Top Layer w0.25: v1(75.85,77.2) DA3.3
GND: BQ1.2 BQ1.4 C1.2 C2.2 C3.2 C4.1 C5.1 C6.1 C7.2 C8.2 C9.2 C10.2 C11.2 C12.2 C13.2 C14.2 C15.2 C16.1 C17.1 C18.1 C19.1 C20.2 C21.2 C22.2 C23.2 C24.1 C25.1 C30.2 C31.2 C32.2 C33.1 C35.1 C36.1 C37.2 C38.1 C39.1 C40.1 C41.1 C42.1 C46.2 C47.2 DA1.2 DA1.8 DA1.9 DA1.15 DA2.6 DA2.12 DA2.13 DA3.6 DA3.12 DA3.13 DA4.10 DA4.11 DD1.3 DD2.3 DD3.3 DD5.8 DD5.23 DD5.47 pad.3 pad.4 R6.2 R24.1 R25.1 R32.1 R33.1 R47.1 VA1.1 VA1.2 VD1.1 VD2.2 VD3.2 VD4.2 VD5.2 VD6.2 VD7.2 VD8.2 VD10.1 VT1.2 X1.2 X2.2 X3.2 X3.8 X3.9 X3.10 X4.4 X4.5 X4.6 XP1.A2 XP1.A4 XP1.A6 XP1.A11 XP1.A12 XP1.A15 XP1.A18 XP1.B2 XP1.B4 XP1.B6 XP1.B11 XP1.B12 XP1.B15 XP1.B18 XS1.2 XS1.3 XS1.4 XS1.5 XS2.2 XS2.3 XS2.4 XS2.5 XT1.1 XT2.1 | length 152.5
  Top Layer w0.25: v1(40.2,82.13) DA2.12 40.7,81.5 DA2.13@41,81.2 ; DA2.13@42.9,80.2 43.2,79.9 DA2.6 v1(43.7,79.3) ; DD1.3 v1(49.3,65.4) ; DD2.3 v1(49.437,68.7) ; DD5.47 v1(55.252,58.366) ; DD5.8 57.161,54.9 v1(57.6,54.9) ; C25.1 61.972,64.797 62.3,64.469 v2(62.3,64.279) ; v1(62.618,57.364) DD5.23 ; v1(74.4,81.715) DA3.12 74.85,81.085 DA3.13@75.15,80.785 ; DA3.13@77.05,79.785 77.35,79.485 DA3.6 v1(77.85,78.885) ; v1(81.05,55.5) X3.2 ; v1(81.05,63) X3.8 ; v2(82.324,40.6) VT1.2
  Top Layer w0.4: VD3.2 v2(40.9,57.561) ; VD2.2 v2(40.9,62.103)
  Top Layer w0.5: X4.4 v2(37.3,58) ; v1(42.3,85.8) 42.3,84.9 42.55,84.65 C14.2 ; v2(48.535,49.432) BQ1.4 v2(50.338,51.235) ; v2(48.6,52) C35.1 49.324,52.676 v2(50,52) ; v2(50.774,55.426) C33.1 ; v2(51.08,63.233) 51.699,62.615 R47.1 ; v2(53.06,50.563) BQ1.2 v2(54.863,52.366) ; v2(53.8,49.9) C36.1@54.476,49.224 ; C36.1 v2(55.2,49.9) ; C42.1 v2(56.478,49.925) ; v2(65.1,39.09) 65.1,40.201 C47.2 ; v1(65.1,50) 65.1,48.999 C46.2 ; v1(76.45,85.3) 76.45,84.45 C11.2 C11.2@76.7,84.315 ; R6.2 v1(78.263,45.8)
  Top Layer w0.7: XP1.B2 v3(56.19,31.5) ; XP1.B4 v3(58.19,31.5) ; XP1.B6 v3(60.19,31.5) ; XP1.B11 v3(65.19,30.5) v3(65.19,31.5) ; XP1.B12 v3(68.19,30.5) v3(68.19,31.5) ; XP1.B15 v3(71.19,30.5) v3(71.19,31.5) ; XP1.B18 v3(74.19,30.5) v3(74.19,31.5)
  Top Layer w0.8: C3.2 61.675,38.625 v2(62.3,38)
  Bottom Layer w0.25: v2(59.154,65.053) 59.717,64.489 DA4.10
  Bottom Layer w0.5: v2(47.2,67.9) 48.2,67.9 C30.2 ; v2(47.2,70.9) 48.2,70.9 C31.2 ; v2(50.158,59.2) C41.1 ; DA1.8 v1(57.48,43.256) ; v1(57.48,46.244) DA1.9 ; C38.1 v2(65.63,53.6) ; v2(65.1,39.09) DA1.2 v1(65.1,43.256) ; v1(65.1,46.244) v1(65.1,50) ; C39.1 v2(67.889,56.097) ; C40.1 v2(67.889,58.797) ; C32.2 v1(68.9,69.6)
  Bottom Layer w0.7: XP1.A2 v3(56.19,30.5) v3(56.19,31.5) ; XP1.A4 v3(58.19,31.5) ; XP1.A6 v3(60.19,30.5) v3(60.19,31.5) ; XP1.A11 v3(65.19,31.5) ; XP1.A12 v3(68.19,30.5) v3(68.19,31.5) ; XP1.A15 v3(71.19,30.5) v3(71.19,31.5) ; XP1.A18 v3(74.19,30.5) v3(74.19,31.5)
  other v1: 85.1,50.1 83.068,51.713 87.3,51.713 68.8,52 85.1,53.263 32.9,53.88 34.9,55.449 77.9,56.092 32.9,57.297 77.9,57.35 77.9,58.6 77.897,59.85 77.9,61.15 77.897,62.4 32.9,62.7 34.9,64.3 83,65.5 87.2,65.5 32.9,65.943 85.1,67.3 64.7,67.324 63.49,69.124 64.7,71.315 72.3,74.42 79.8,74.465 45.59,74.9 38,74.965 71.2,75.4 80.7,75.4 70.31,79.785 47.7,80.35 69.19,80.925 48.7,81.3 80.2,81.54 37.9,81.8 69.61,82.2 48.4,82.5 81.2,82.494 44.3,83.324 49.6,83.6 40.3,83.633 80.2,83.7 37.85,84 73.19,84.2 80.2,84.3 61.715,84.715 74.3,85.3 54.55,85.75 44.3,85.8 62.8,85.924 80.2,86.569 81.4,87.7 61.992,88.1 64.9,88.1 36.6,88.3 80.2,88.8 74.475,89 83.5,89 37.8,89.4 34.5,89.5 43.491,89.5 72.275,92.039 76.575,92.039 81.3,92.039 85.6,92.039 56.028,92.4 64.9,92.4 53.1,92.418 45.59,92.5 32.3,92.539 36.6,92.539 41.4,92.539 61.9,93.5
  other v2: 38.4,33.4 35.5,34.118 45,34.251 58.629,34.272 49.17,34.45 33.5,35.875 37.2,35.875 43.2,35.875 46.734,35.875 52.736,35.875 58.8,38.6 52.548,38.625 43.1,38.675 41.297,40.4 50.781,40.4 74.963,40.6 76.8,40.6 73.2,40.626 41.297,45.2 80.626,47 82.15,47 30,48.8 80.2,50.3 41.297,50.33 48.36,58.25 30,59.25 39.876,64.873 58.305,65.089 58.305,66.043 59.154,66.043 79,66.514 54.676,71.3 52.619,72.276 30,78.885 85.1,82.363 30,90.056
  other v3: 58.2,30.5
  other v4: 32.9,70.75 85.1,70.75 31.4,71.5 34.4,71.5 83.6,71.5 86.6,71.5 30.65,73 35.15,73 82.85,73 87.35,73 31.4,74.5 34.65,74.5 83.6,74.5 86.85,74.5 32.9,75.25 85.1,75.25
  other v5: 75.175,79.85 76.1,79.85 77.05,79.85 41.025,80.265 41.95,80.265 42.9,80.265 75.15,80.75 76.1,80.75 77.05,80.75 41,81.165 41.95,81.165 42.9,81.165
JTAG_RST: DD5.40 R48.1 VD8.1 X3.7 | length 32
  Top Layer w0.25: DD5.40 57.464,61.104 v1(57.464,60.169) ; VD8.1 v1(81,61.8) 82.15,61.8 X3.7
  Bottom Layer w0.25: R48.1 57.3,60.005 v1(57.464,60.169) 57.464,62.122 58.942,63.6 75.547,63.6 77.347,61.8 v1(81,61.8)
JTAG_TCK: DD5.37 VD5.1 X3.4 | length 28.1
  Top Layer w0.25: DD5.37 59.66,61.029 v1(59.66,60.169) ; VD5.1 v1(81,58) X3.4
  Bottom Layer w0.25: v1(59.66,60.169) 59.66,60.181 60.52,61.041 73.2,61.041 76.241,58 v1(81,58)
JTAG_TDI: DD5.38 VD6.1 X3.5 | length 28.9
  Top Layer w0.25: DD5.38 58.905,61.077 v1(58.905,60.169) ; VD6.1 v1(81,59.25) X3.5
  Bottom Layer w0.25: v1(58.905,60.169) 58.905,60.876 59.919,61.89 73.935,61.89 76.574,59.25 v1(81,59.25)
JTAG_TDO: DD5.39 VD7.1 X3.6 | length 29.7
  Top Layer w0.25: DD5.39 58.19,61.085 v1(58.19,60.169) ; VD7.1 v1(81,60.5) X3.6
  Bottom Layer w0.25: v1(58.19,60.169) 58.19,61.464 59.483,62.757 74.637,62.757 76.894,60.5 v1(81,60.5)
JTAG_TMS: DD5.34 VD4.1 X3.3 | length 26.1
  Top Layer w0.25: v1(60.461,60.169) 60.461,60.282 60.175,60.568 60.175,61.45 DD5.34 ; VD4.1 v1(81,56.7) 82.15,56.7 X3.3
  Bottom Layer w0.25: v1(60.461,60.169) 72.307,60.169 75.776,56.7 v1(81,56.7)
MISO: DA1.11 DD5.12 | length 6.1
  Top Layer w0.25: DD5.12 57.692,52.603 57.692,51.955 59.347,50.3 v1(60.02,50.3)
  Bottom Layer w0.25: DA1.11 v1(60.02,50.3)
MISO2: DD5.26
MISO_IN: DA1.6 XP1.A8 | length 22.2
  Top Layer w0.25: v1(60,43.3) 63.2,40.1 v1(63.2,35.929)
  Bottom Layer w0.25: DA1.6 v1@60.02,43.256 ; XP1.A8 62.19,34.919 v1(63.2,35.929)
MOSI: DA1.14 DD5.13 | length 7.1
  Top Layer w0.25: DD5.13 60.662,52.249 v1(60.662,51.72)
  Bottom Layer w0.25: v1(60.662,51.72) 62.31,51.72 63.83,50.201 DA1.14
MOSI2: DD3.2 DD5.27 | length 13.4
  Top Layer w0.25: DD5.27 63.148,59.462 70.8,67.114 v1(70.8,68.85) DD3.2
MOSI_IN: DA1.3 XP1.A9 | length 16.4
  Bottom Layer w0.25: XP1.A9 63.19,34.69 63.83,35.33 DA1.3
NetBQ1_1: BQ1.1 C36.2 DD5.6 | length 11.1
  Top Layer w0.25: C36.2 51.396,48.376 BQ1.1 51.396,48.899 51.396,50.549 DD5.6
NetBQ1_3: BQ1.3 C35.2 DD5.5 | length 6.5
  Top Layer w0.25: C35.2 51.904,53.524 BQ1.3 53.356,54.253 54.392,54.253 DD5.5
NetC25_2: C25.2 DA4.7 | length 5.2
  Top Layer w0.25: C25.2 61.972,67.761 v1(62.411,68.2)
  Bottom Layer w0.25: DA4.7 62.156,65.989 62.411,66.244 v1(62.411,68.2)
NetC37_1: C37.1 R44.2 R46.1 | length 4.2
  Top Layer w0.25: R44.2 46.834,60.58 C37.1 48.668,60.58 ccw(c48.668,63.12) 50.464,61.324 R46.1
NetDA1_7: DA1.7 R8.2 | length 6.1
  Bottom Layer w0.25: R8.2 56.6,44.2 58.2,44.2 58.75,43.65 DA1.7
NetDA1_10: DA1.10 R17.2 | length 6.1
  Bottom Layer w0.25: R17.2 56.5,45.2 58.22,45.2 58.75,45.73 DA1.10
NetDA2_1: DA2.1 R24.2 R26.1 | length 4.9
  Top Layer w0.25: R24.2 38,78.1 39.1,79.2 R26.1 40.035,79.9 DA2.1
NetDA2_2: DA2.2 R20.2 | length 3.1
  Top Layer w0.25: R20.2 40.219,77.2 41.2,78.181 DA2.2
NetDA2_4: DA2.4 R22.2 | length 3.4
  Top Layer w0.25: DA2.4 42.2,78.15 43.15,77.2 R22.2
NetDA2_5: DA2.5 R25.2 R27.1 | length 7.5
  Top Layer w0.25: DA2.5 42.7,78.7 42.9,78.5 43.9,78.5 44.7,79.3 R27.1@44.7,79.8 ; R27.1@44.8,79.7 R27.1@44.7,79.8 ; R25.2 45.6,79.7 45.4,79.9 R27.1 ; R27.1@44.7,79.8 44.6,79.9 R27.1 ; R27.1@44.7,79.8 R27.1
NetDA3_1: DA3.1 R32.2 R34.1 | length 4.9
  Top Layer w0.25: R32.2 72.3,77.5 73.2,78.4 R34.1 74.17,79.5 DA3.1
NetDA3_2: DA3.2 R28.2 | length 3.1
  Top Layer w0.25: R28.2 74.426,76.8 75.35,77.724 DA3.2
NetDA3_4: DA3.4 R30.2 | length 3.4
  Top Layer w0.25: DA3.4 76.35,77.8 77.35,76.8 R30.2
NetDA3_5: DA3.5 R33.2 R35.1 | length 7.2
  Top Layer w0.25: DA3.5 76.85,78.25 77.1,78 78,78 79,79 R35.1 79.6,79.5 79.8,79.3 R33.2
NetDD5_19: DD5.19 R50.1 | length 2
  Top Layer w0.25: DD5.19 62.085,55.078 R50.1
NetDD5_44: DD5.44 R46.2 R47.2 | length 5
  Top Layer w0.25: R46.2 51.616,60.48 R47.2 53.891,61.554 54.56,60.885 54.854,60.885 DD5.44
NetR1_1: R1.1 XP1.B7 | length 25.7
  Top Layer w0.25: XP1.B7 61.19,31.49 65.3,35.6 70.9,35.6 72.263,36.963 R1.1
NetR1_2: R1.2 R2.2 R3.2 R4.2 R5.1 R6.1 | length 8.6
  Top Layer w0.4: R1.2 R2.2 ; R5.1 74.1,44.237 R2.2 ; R6.1 R3.2 ; R4.2 R3.2 ; R2.2 R3.2
NetR2_1: R2.1 XP1.B8 | length 26
  Top Layer w0.25: XP1.B8 62.19,31.485 65.805,35.1 71.4,35.1 74.063,37.763 R2.1
NetR3_1: R3.1 XP1.B9 | length 26.2
  Top Layer w0.25: XP1.B9 63.19,31.49 66.3,34.6 71.7,34.6 75.863,38.763 R3.1
NetR4_1: R4.1 XP1.B10 | length 26.4
  Top Layer w0.25: XP1.B10 64.19,31.49 66.7,34 71.9,34 77.663,39.763 R4.1
NetR7_2: R7.2 VD1.2 | length 2.9
  Bottom Layer w0.25: VD1.2 57.25,92.25 R7.2
NetR50_2: R50.2 VD10.2 | length 2
  Top Layer w0.25: R50.2 64.862,52.301 ; 64.862,52.301 ccw(c65.588,53.027) 65.588,52 VD10.2
OUT1: C16.2 DA2.11 L4.1 R26.2 | length 6.3
  Top Layer w0.25: C16.2@39.1,82.665 39.35,82.915 40.987,82.915 41.2,82.702 DA2.11
  Top Layer w0.5: R26.2 39.1,82.665 C16.2
  Top Layer w0.7: C16.2 L4.1
OUT2: C17.2 DA2.7 L5.1 R27.2 | length 3.5
  Top Layer w0.5: R27.2 C17.2 L5.1
OUT3: C18.2 DA3.7 L6.1 R35.2 | length 3.3
  Top Layer w0.5: R35.2 C18.2 L6.1
OUT4: C19.2 DA3.11 L7.1 R34.2 | length 6.4
  Top Layer w0.25: 73.2,82.2 73.5,82.5 75.137,82.5 75.35,82.287 DA3.11
  Top Layer w0.5: L7.1 71.5,82.635 C19.2 R34.2
OUT5_1: C22.1 L6.2 XS2.1 | length 6.5
  Top Layer w0.7: L6.2 C22.1 XS2.1
OUT5_2: C23.1 L7.2 VA1.3 X2.1 | length 27.2
  Top Layer w0.5: X2.1 69.61,86.49 C23.1 69.655,84.355 L7.2
  Bottom Layer w0.5: VA1.3 67.8,78.509 67.8,82.5 69.6,84.3 v1(69.6,85.35)
OUT12_1: C20.1 L4.2 XS1.1 | length 6.6
  Top Layer w0.7: XS1.1@39,93 39,86.555 L4.2
OUT12_2: C21.1 L5.2 X1.1 | length 7.2
  Top Layer w0.5: L5.2 46.63,84.8 C21.1 48.3,84.9 X1.1
RESET: DD5.7 R18.2 R48.2 VT1.3 | length 33.7
  Top Layer w0.25: DD5.7 57.303,55.749 v1(57.303,56.162) ; v1(71.3,51) 77.626,51 R18.2 77.67,51.03 78.341,51.03 81.374,47.997 VT1.3
  Bottom Layer w0.25: R48.2 57.303,57.297 v1(57.303,56.162) 58.717,54.748 67.552,54.748 v1(71.3,51)
SCL: DD5.42 VD2.1 X4.1 | length 23.5
  Top Layer w0.25: X4.1 37.357,61.75 37.71,62.103 VD2.1 38.7,62.7 40.5,64.5 52.654,64.5 DD5.42
SDA: DD5.43 VD3.1 X4.2 | length 27
  Top Layer w0.25: X4.2 37.307,60.5 38.7,59.107 VD3.1 39.511,56.75 41.143,56.75 48.302,63.908 52.538,63.908 54.986,61.46 DD5.43
SOFT_RESET: VT1.1 XP1.B16 | length 20.6
  Top Layer w0.25: XP1.B16 72.19,31.737 80.424,39.972 VT1.1
USART1_CTS: DD5.32
USART1_RTS: DD5.33
USART1_RX: DD5.31
USART1_TX: DD5.30
VoutA: DA4.2 R20.1 | length 22.9
  Top Layer w0.25: R20.1 39.6,74.415 39.75,74.265 v1(39.75,73.2)
  Bottom Layer w0.25: v1(39.75,73.2) 42.85,70.1 50.355,70.1 55.466,64.989 DA4.2
VoutB: DA4.3 R22.1 | length 19.8
  Top Layer w0.25: v1(43.95,73.2) 43.95,74.265 44.1,74.415 R22.1
  Bottom Layer w0.25: v1(43.95,73.2) 50.2,73.2 52.8,70.6 52.8,68.368 55.654,65.514 56.575,65.514 DA4.3
VoutC: DA4.8 R28.1 | length 20.6
  Top Layer w0.25: R28.1 73.8,73.885 73.9,73.785 v1(73.9,72.6)
  Bottom Layer w0.25: DA4.8 69.789,65.489 73.9,69.6 v1(73.9,72.6)
VoutD: DA4.9 R30.1 | length 24.7
  Top Layer w0.25: v1(78.2,72.6) 78.2,73.785 78.3,73.885 R30.1
  Bottom Layer w0.25: DA4.9 72.839,64.989 78.2,70.35 v1(78.2,72.6)
pads on no net: DD1.1 DD2.1 DD3.1 DD5.2 DD5.3 DD5.4 DD5.10 DD5.15 DD5.16 DD5.18 DD5.20 DD5.21 DD5.22 DD5.28 DD5.29 DD5.35 DD5.36 DD5.41 VD1.3 XP1.A13 XP1.A14 XP1.A16 XP1.A17 XP1.B13 XP1.B14 XP1.B17
copper on no net: | length 37.7
  Top Layer w0.15: 33.8,86.1 ccw(c32.3,86.1) 33.8,86.1 ; 86.85,34 ccw(c85.35,34) 86.85,34
  Bottom Layer w0.15: 33.8,86.1 ccw(c32.3,86.1) 33.8,86.1 ; 86.9,34 ccw(c85.4,34) 86.9,34

## Polygon pours and split planes (outlines as drawn)
GND on Top Layer "GND_L01_P020" (solid, remove dead copper, pour order 20): 29,95 89,95 89,30 54.5,30 54,30.5 29,30.5
+12V_IN on Top Layer "+12V_IN_L01_P002" (solid, remove dead copper, pour order 2): 55.625,32.146 55.625,30.1 54.4,30.1 54,30.5 40.9,30.5 40.2,31.2 40.2,36.9 42.4,36.9 42.4,33.8 43.385,32.815 54.956,32.815
no net on Top Layer "NONET_L01_P000" (solid, remove dead copper, pour order 0): 55.5,30.5
GND on Power Layer "GND_L03_P022" (solid, remove dead copper, pour order 22): 29,95 89,95 89,30 54.5,30 54,30.5 29,30.5
+5V on Power Layer "+5V_L03_P014" (solid, remove dead copper, pour order 14): 68.6,94.5 48.415,94.5 47.415,93.5 47.425,93.489 47.425,92.475 48.4,91.5 69,91.5 69.6,92.1 69.6,93.5
+12V on Power Layer "+12V_L03_P004" (solid, remove dead copper, pour order 4): 31.3,42.2 34.6,38.9 36.1,38.9 37.6,40.4 37.6,56.1 36.8,56.9 36.8,62.8 40.2,66.2 40.2,80.9 41.2,81.9 77.1,81.9 78,82.8 78,86.2 77.5,86.7 39,86.7 36.8,84.5 36.8,70.4 31.3,64.9
+3V3 on Power Layer "+3V3_L03_P010" (solid, remove dead copper, pour order 10): 50.774,41.976 53.66,39.09 56.19,39.09 56.8,39.7 56.8,47.74 58.434,49.374 58.434,55.314 52.848,60.9 47.203,60.9 45.5,62.603 45.5,71.656 46.869,73.024 53.632,73.024 56.732,69.924 62.421,69.924 64.775,72.278 64.775,72.498 61.458,75.8 43.7,75.8 41.1,73.2 41.1,64.789 40.2,63.889 40.2,59 44.276,54.924 48.924,54.924 50.774,53.315 50.774,47.226
+3V3 on Power Layer "+3V3_L03_P012" (solid, remove dead copper, pour order 12): 52.601,46.366 52.994,46.758 64.352,46.758 65.63,48.036 65.63,50.381 62.944,53.067 62.127,53.067 61.465,53.729 61.465,54.809 63.729,57.073 63.729,59.336 64.374,59.981 65.364,59.981 69.076,56.269 69.076,55.138 69.963,54.25 80.076,54.25 81.05,55.224 83.224,55.224 84.5,56.5 84.5,63.5 85.5,64.5 87,64.5 88,63.5 88,55 80.74,47.74 75.24,47.74 68.5,41 68.5,39.1 67.4,38 66.19,38 65.19,39 65.19,43 53.101,43 52.601,43.5
+5V on Power Layer "+5V_L03_P008" (solid, remove dead copper, pour order 8): 46,62.8 46.3,62.5 47.437,62.5 50.337,65.4 68,65.4 68.65,66.05 69.6,67 69.6,70.7 69,71.3 67.4,71.3 67,70.9 67,70 66.6,69.6 53.6,69.6 50.6,72.6 47.7,72.6 46,70.9
GND on GND layer "GND_L02_P016" (solid, remove dead copper, pour order 16): 29,95 89,95 89,30 54.5,30 54,30.5 29,30.5
GND on Bottom Layer "GND_L04_P018" (solid, remove dead copper, pour order 18): 29,95 89,95 89,30 54.5,30 54,30.5 29,30.5

## Other copper
Top Layer:
  pour cut-out: 38.15,62.503 39.55,62.503 39.55,61.712 39.559,61.703 38.15,61.703
  pour cut-out: 38.15,57.961 39.55,57.961 39.55,57.17 39.559,57.161 38.15,57.161
  pour cut-out: 75.313,45.15 75.313,46.45 76.713,46.45 76.713,45.15
  pour cut-out: 72.95,75.95 71.65,75.95 71.65,77.35 72.95,77.35
  pour cut-out: 79.15,77.35 80.45,77.35 80.45,75.95 79.15,75.95
  pour cut-out: 46.25,76.35 44.95,76.35 44.95,77.75 46.25,77.75
  pour cut-out: 37.35,77.75 38.65,77.75 38.65,76.35 37.35,76.35
  pour cut-out: 46.084,58.73 46.084,61.23 47.384,61.23 47.384,58.73
  pour cut-out: 72.15,46.45 74.65,46.45 74.65,45.15 72.15,45.15
  pour cut-out: 77.013,49.087 77.013,51.587 78.313,51.587 78.313,49.087
  pour cut-out: 51.426,64.85 51.426,67.35 52.726,67.35 52.726,64.85
  pour cut-out: 51.426,68.15 51.426,70.65 52.726,70.65 52.726,68.15
  pour cut-out: 65.631,67.55 65.631,70.05 66.931,70.05 66.931,67.55
  pour cut-out: 72.55,78.95 72.55,81.45 73.85,81.45 73.85,78.95
  pour cut-out: 78.35,78.95 78.35,81.45 79.65,81.45 79.65,78.95
  pour cut-out: 77.65,74.85 77.65,77.35 78.95,77.35 78.95,74.85
  pour cut-out: 73.15,74.85 73.15,77.35 74.45,77.35 74.45,74.85
  pour cut-out: 44.05,79.35 44.05,81.85 45.35,81.85 45.35,79.35
  pour cut-out: 38.45,79.35 38.45,81.85 39.75,81.85 39.75,79.35
  pour cut-out: 38.95,75.25 38.95,77.75 40.25,77.75 40.25,75.25
  pour cut-out: 43.45,75.25 43.45,77.75 44.75,77.75 44.75,75.25
  pour cut-out: 50.922,47.294 49.791,48.425 52.619,51.254 53.8,50.073 53.8,49.9
  pour cut-out: 49.649,51.678 52.478,54.506 52.494,54.506 53.476,53.524 53.476,52.999 50.902,50.425
  pour cut-out: 39.975,37.5 42.625,37.5 42.625,36.2 40.131,36.2 39.975,36.356
  pour cut-out: 49.437,34.713 49.416,34.734 49.416,37.5 49.641,37.725 49.741,37.625 51.841,37.625 52.153,37.313 52.153,34.725
  pour cut-out: 59.003,34.688 58.982,34.709 58.982,37.475 59.207,37.7 59.307,37.6 61.407,37.6 61.719,37.288 61.719,34.7
  pour cut-out: 55.955,39.812 55.976,39.791 55.976,37.025 55.751,36.8 55.651,36.9 53.551,36.9 53.239,37.212 53.239,39.8
  pour cut-out: 46.365,39.812 46.386,39.791 46.386,37.025 46.161,36.8 46.061,36.9 43.961,36.9 43.649,37.212 43.649,39.8
  pour cut-out: 36.804,39.812 36.825,39.791 36.825,37.025 36.6,36.8 36.5,36.9 34.4,36.9 34.088,37.212 34.088,39.8
  pour cut-out: 71.613,44.2 78.313,44.2 78.313,42.25 71.613,42.25
  pour cut-out: 54.129,57.781 54.129,57.942 58.862,62.626 59.12,62.626 63.844,57.902 63.844,57.685 59.115,52.956 58.905,52.956
  pour cut-out: 54.365,58.113
  region net OUT3: 77.35,82 78.35,83 79,83 79,82 78,82 77.35,81.35
  region net OUT4: 72.9,82.35 73.25,82.7 75.1,82.7 75.4,82.4 73.9,82.4 73.5,82 73.5,81.1 72.9,81.1
  region net OUT1: 38.75,82.765 39.1,83.115 40.95,83.115 41.25,82.815 39.47,82.815 39.07,82.415 38.75,82.415
  region net OUT2: 43.2,82.4 44.3,82.4 45,81.7 45,81.3 44.3,81.3 44.3,81.7 44.1,81.9 43.2,81.9
  region net +12V: 34.3,37.7 34.3,42.1 36.6,42.1 36.6,37.7
Power Layer:
  pour cut-out: 56.4,71.752 56.4,72.693 57.353,72.693 57.353,71.75
Bottom Layer:
  pour cut-out: 57.85,90.45 60.343,90.45 60.343,91.85 57.85,91.85
  pour cut-out: 57.713,48.643 57.713,40.85 66.483,40.85 66.783,40.933 66.783,45.05 66.7,48.643 66.056,48.1 63.783,48.1 63.331,48.643
  pour cut-out: 57.73,41.35
  pour cut-out: 57.492,66.899 59.942,66.899 59.942,64.199 57.492,64.199
  pour cut-out: 56.65,56.75 57.95,56.75 57.95,59.15 57.85,59.25 56.65,59.25
  pour cut-out: 53.85,44.05 53.85,42.75 56.25,42.75 56.35,42.85 56.35,44.05
  pour cut-out: 53.85,46.55 53.85,45.25 56.25,45.25 56.35,45.35 56.35,46.55

## Silkscreen, mask and mechanical layers (free items; w line width, h text height)
Top Overlay:
  drawing of 2073 lines, arcs and shapes, not listed
Bottom Overlay:
  drawing of 2073 lines, arcs and shapes, not listed
Mechanical 3:
  lines w0.254: 65.775,28.925 cw(c66.725,28.953) 67.675,28.925
  lines w0.3: 65.775,28.925 65.775,21.875 ; 67.675,28.9 67.675,21.875 68.175,21.375 87.175,21.375 89,23.2 89,95 29,95 29,22 29.625,21.375 51.075,21.375 51.075,28.375 cw(c52.875,28.4) 54.675,28.375 54.675,21.875 55.175,21.375 65.275,21.375 65.775,21.875 ; 65.775,21.875 65.775,21.875

## Text inside footprints (layer, text, board x,y; h text height)
VA1: Top Overlay "-" at 59.491,68.47 h1.27; Top Overlay "+" at 60.991,69.47 h1.27
XP1: Top Overlay "B1" at 54.89,27.6 h1.27; Mechanical 1 "B1" at 54.89,27.6 h1.27